# Altium PCB USB_Control.PcbDoc (part 1 of 2)
Units mil, origin at the board's own origin, x right, y up, seen from the top; angles counter-clockwise.
Board outline 3100 x 2250 mil, 4 copper layers (Component Side, Ground Plane, Power Plane, Solder Side), stack 26.634 mil thick; 203 components, 126 nets, 671 pads, 284 vias.
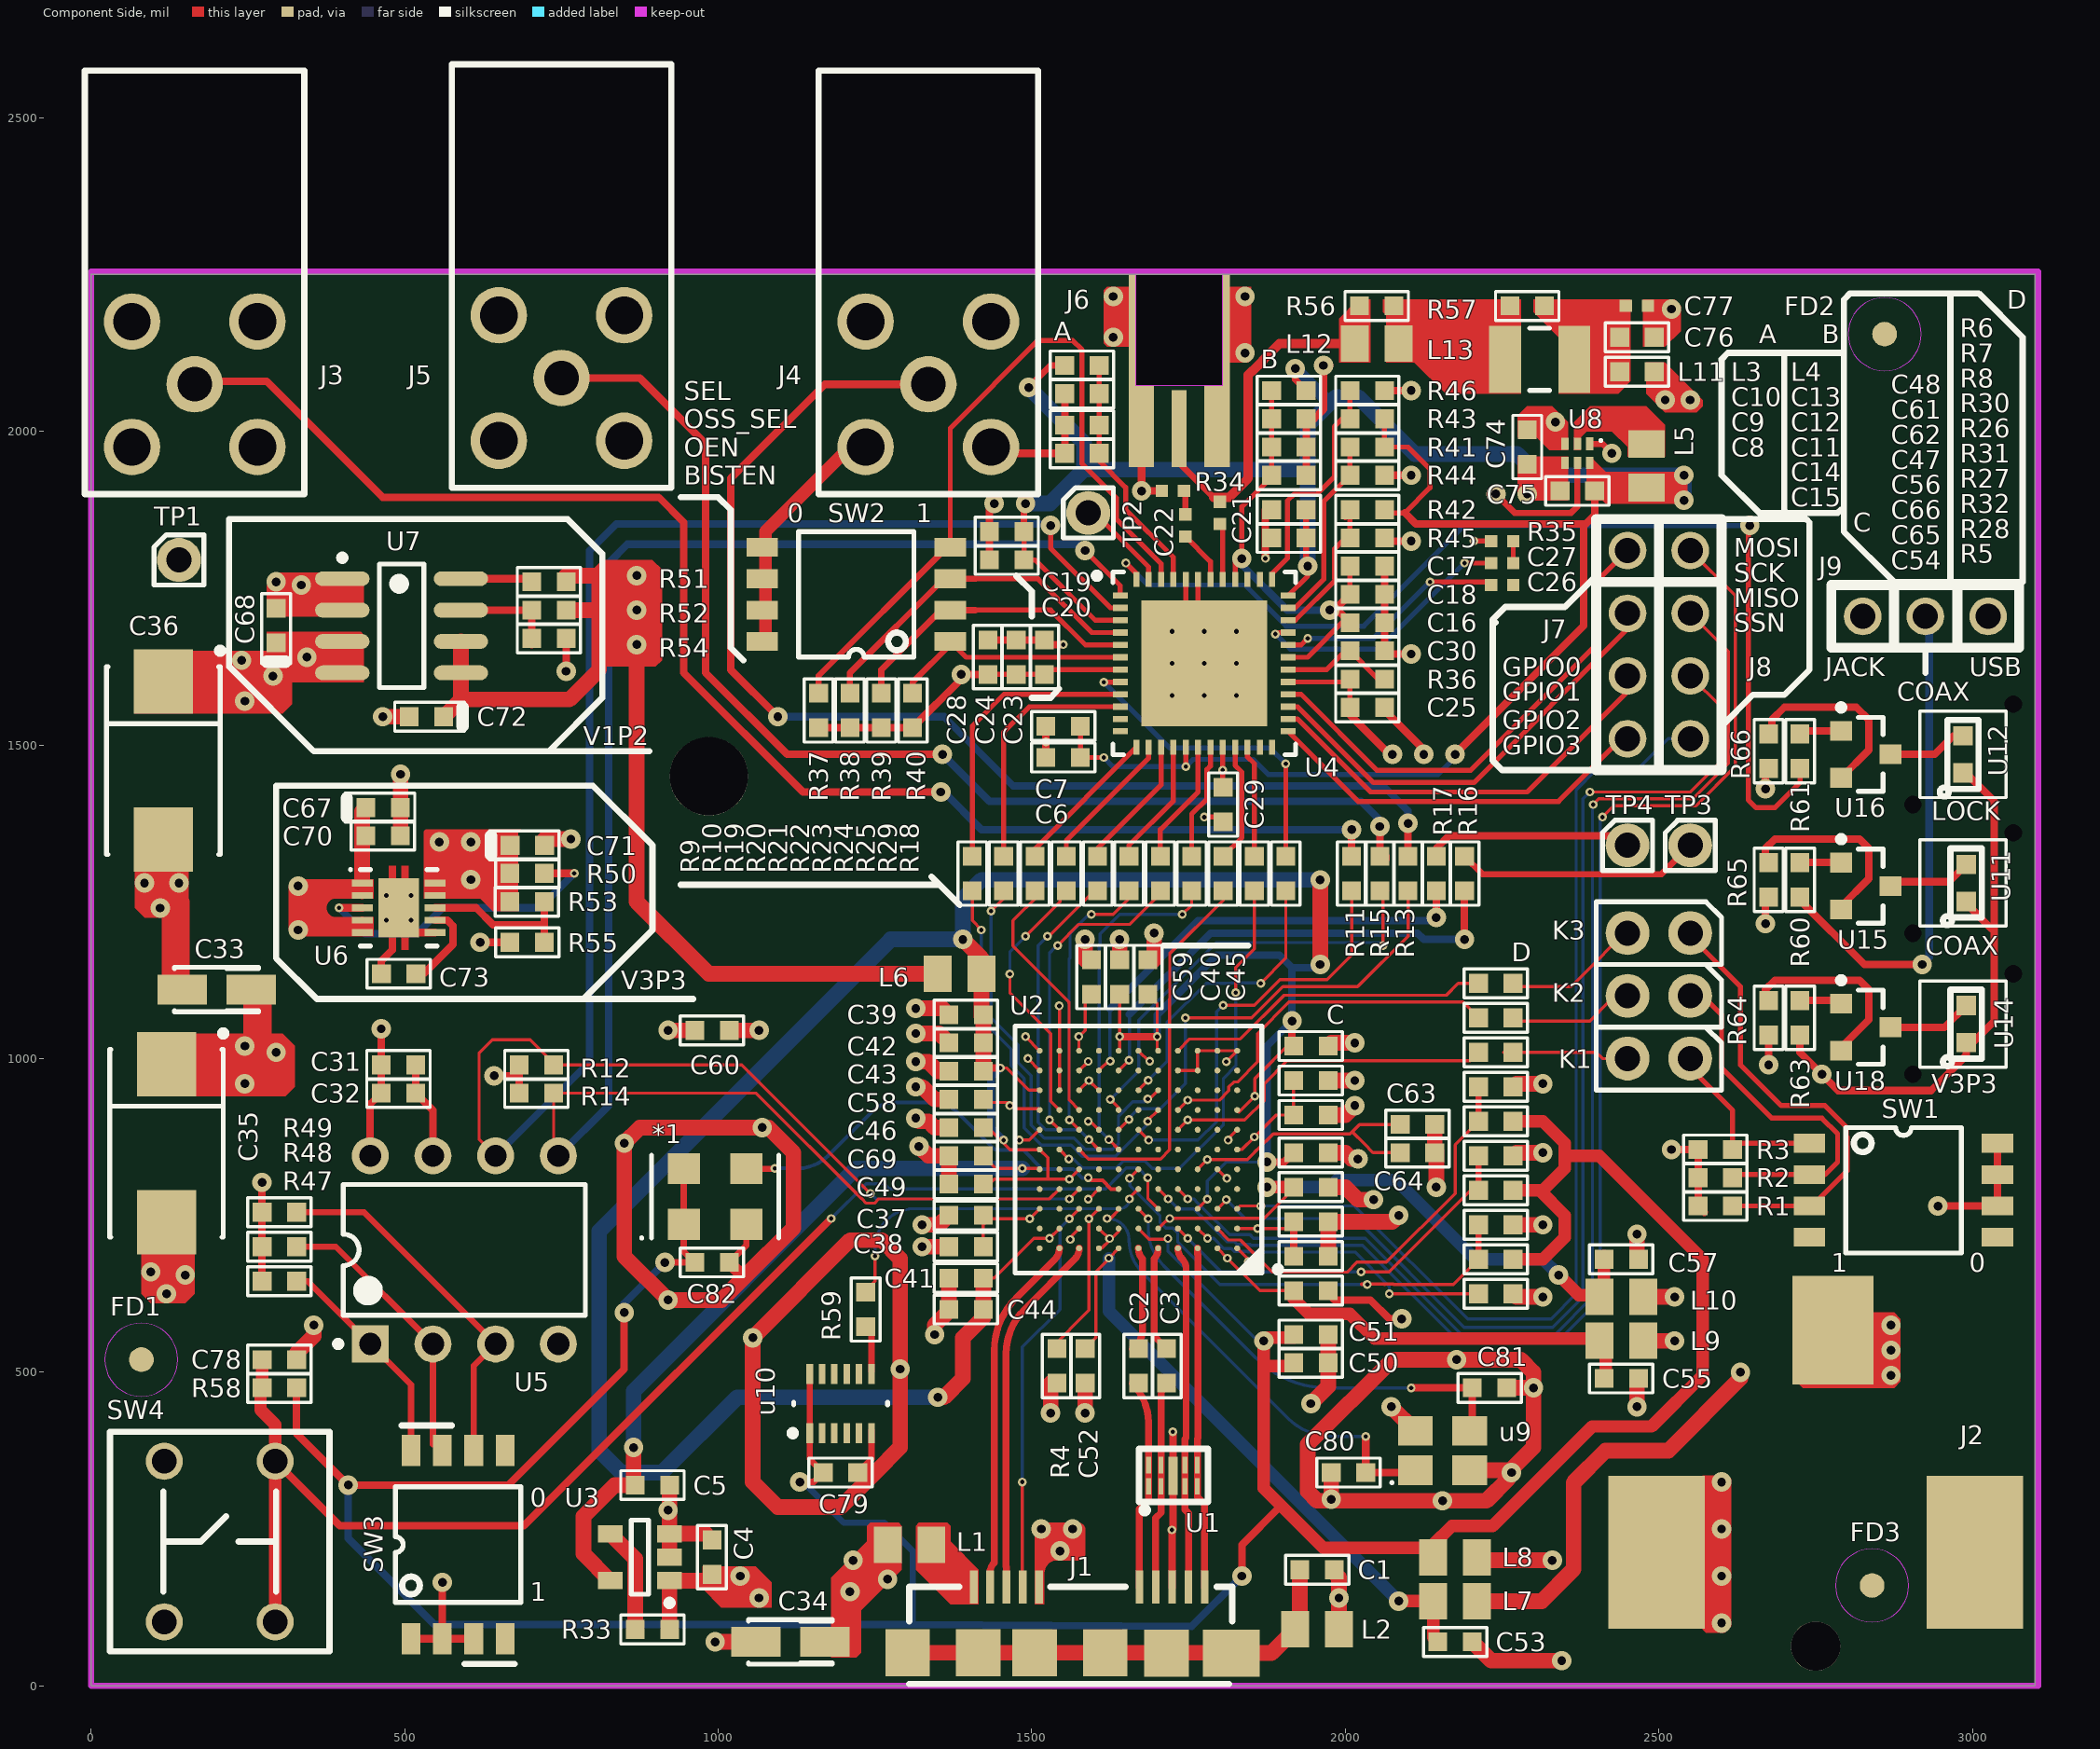
[diagram p0: Component Side view]
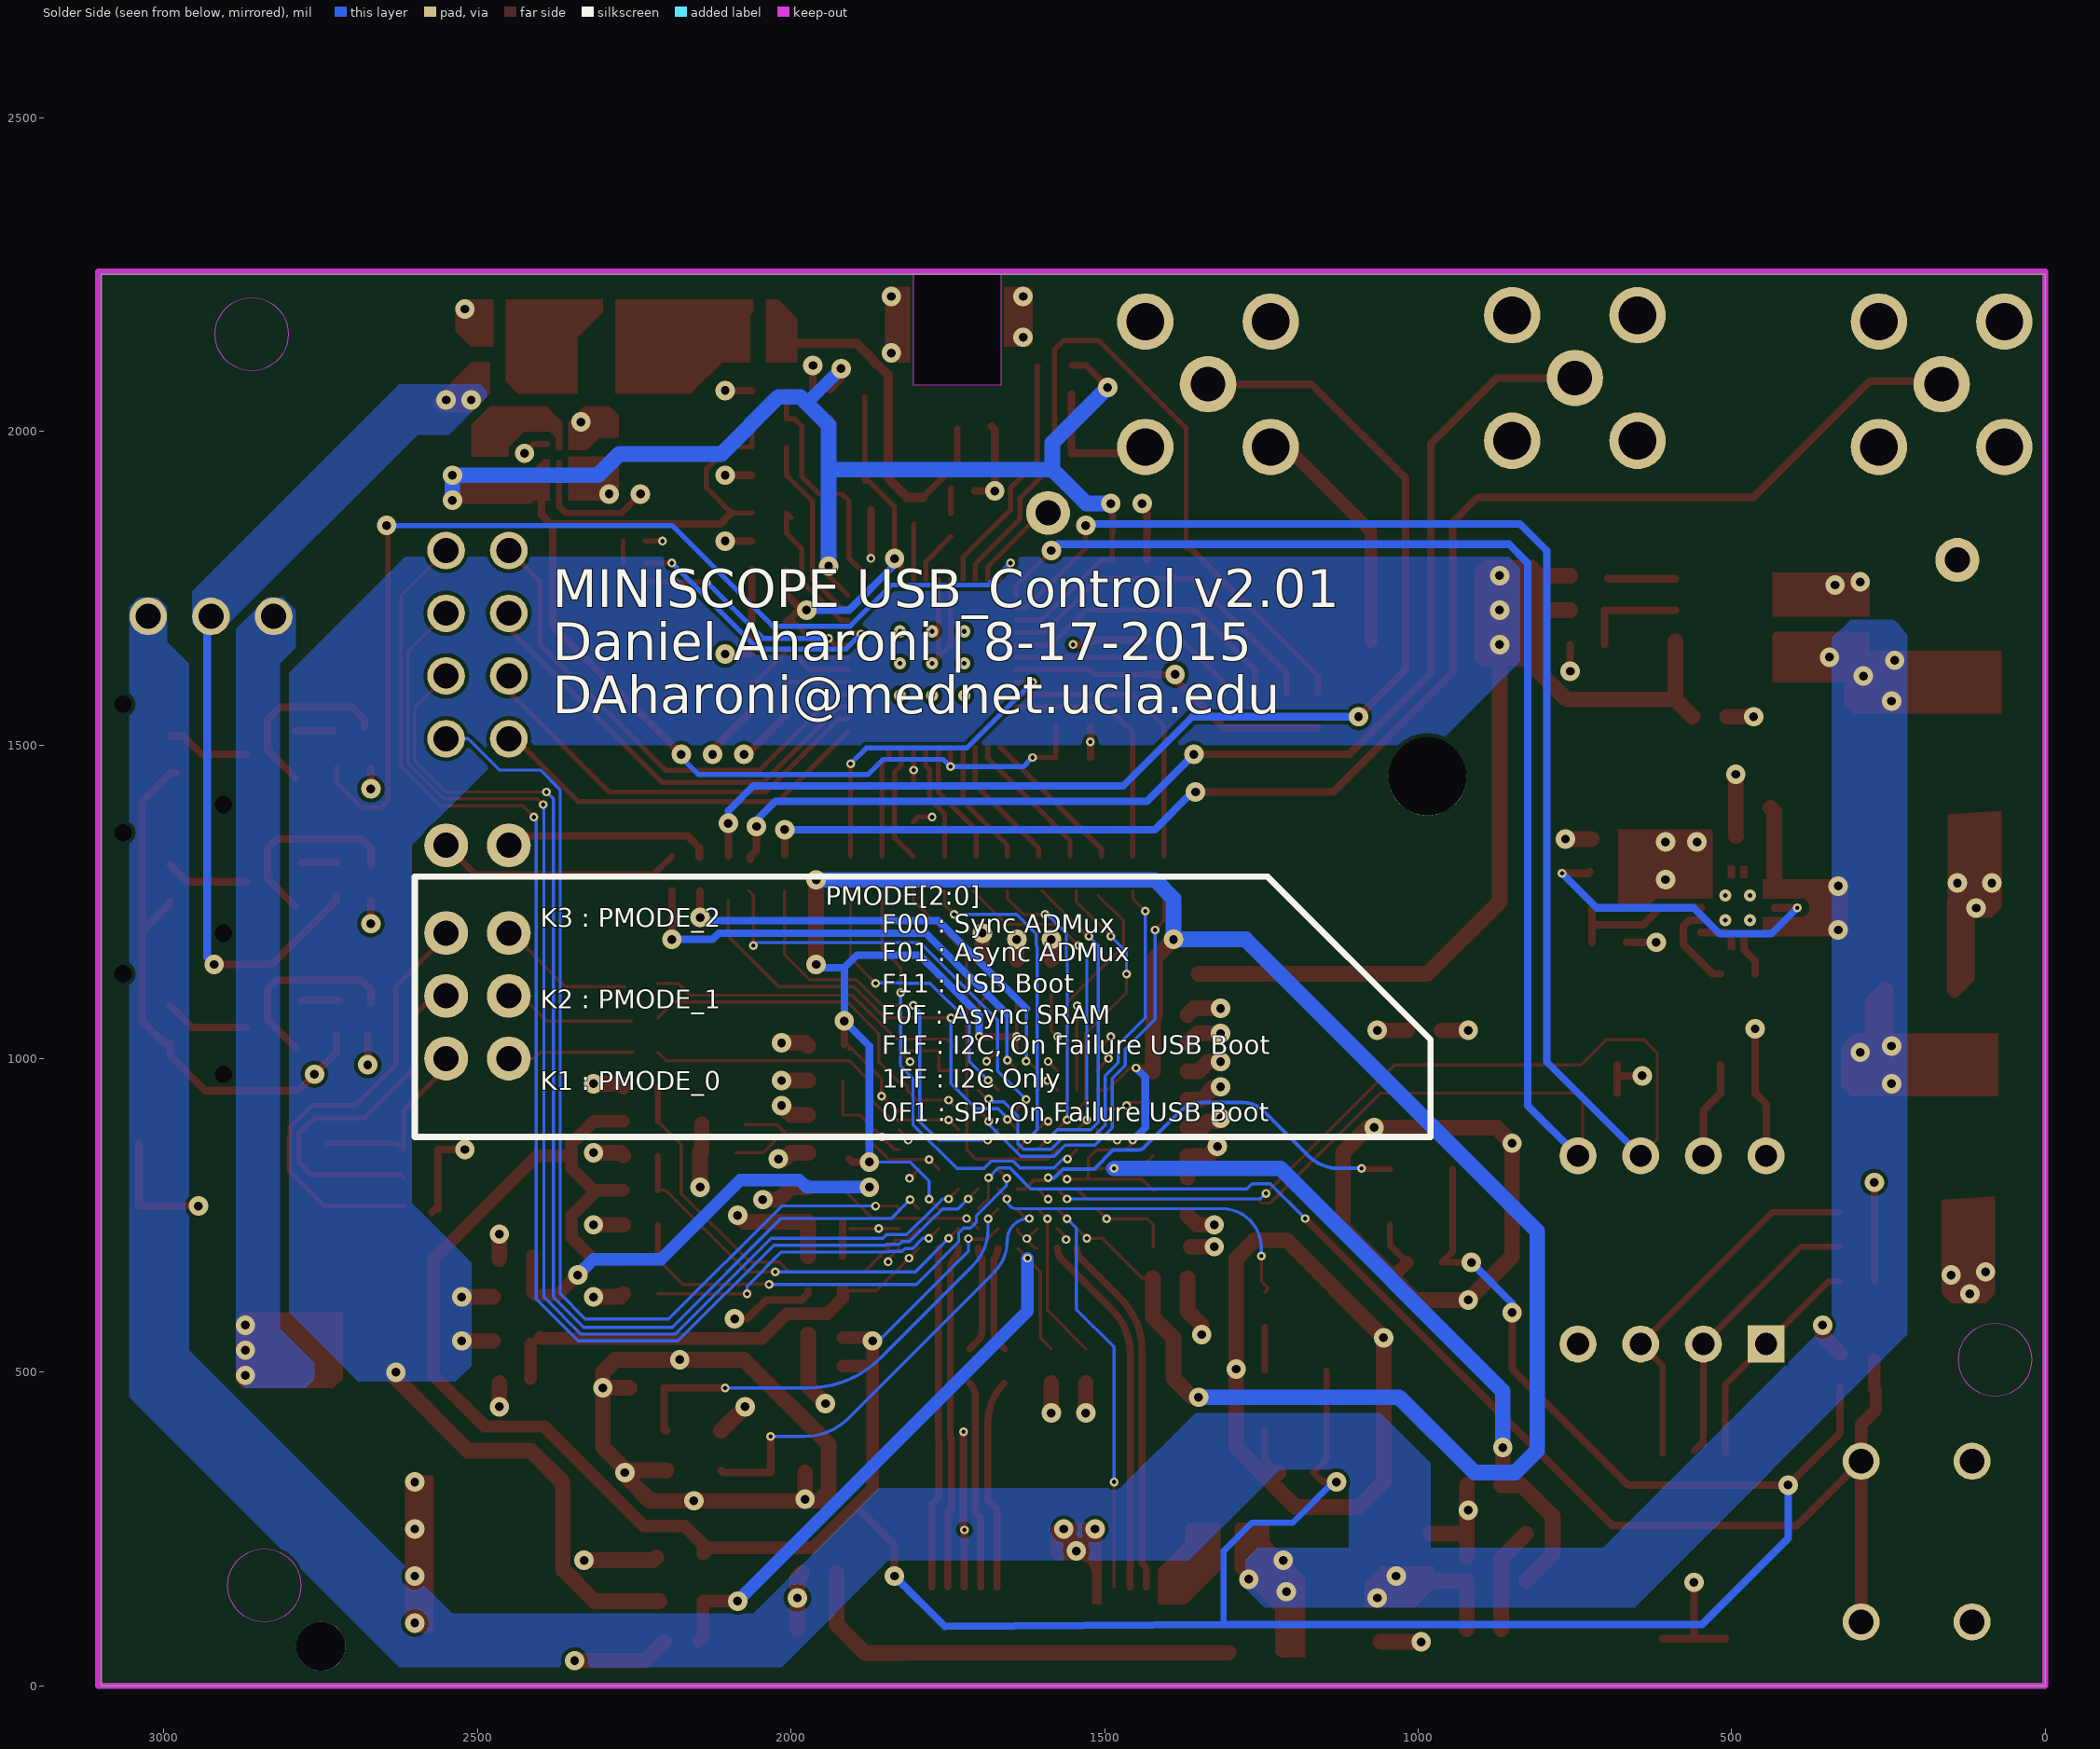
[diagram p1: Solder Side view, seen from below]
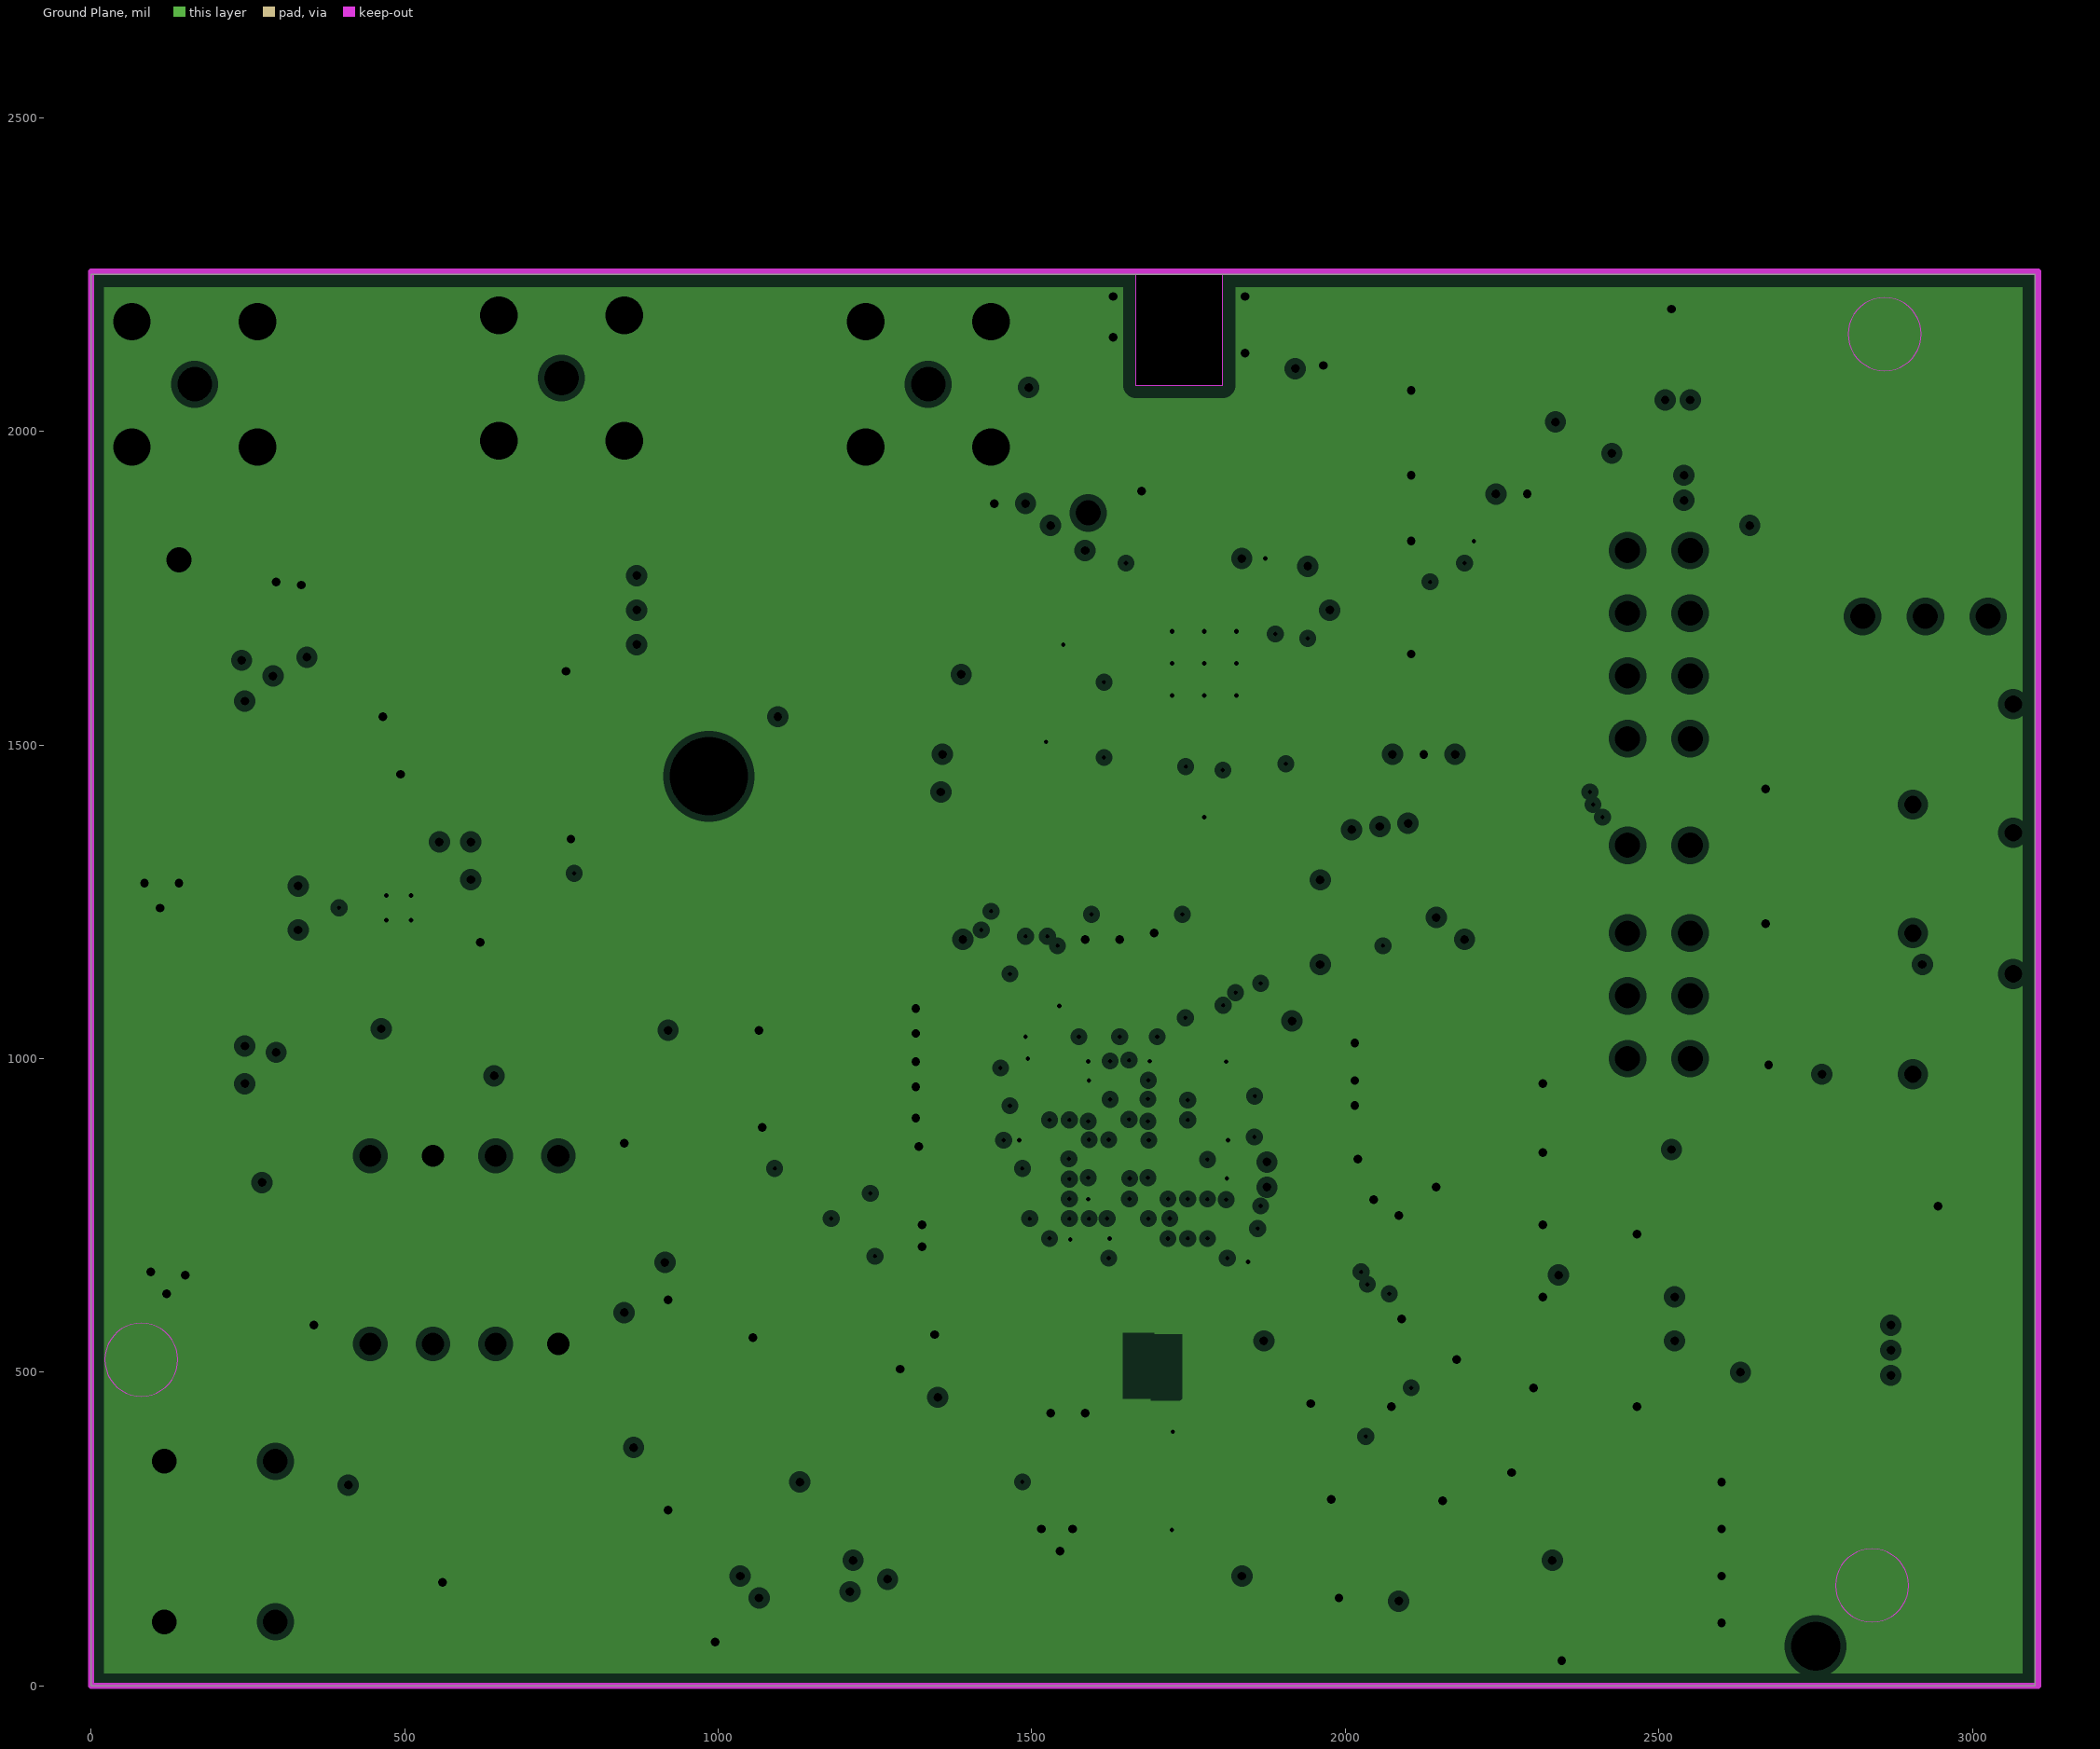
[diagram p2: Ground Plane, clearances drawn from the general rule]
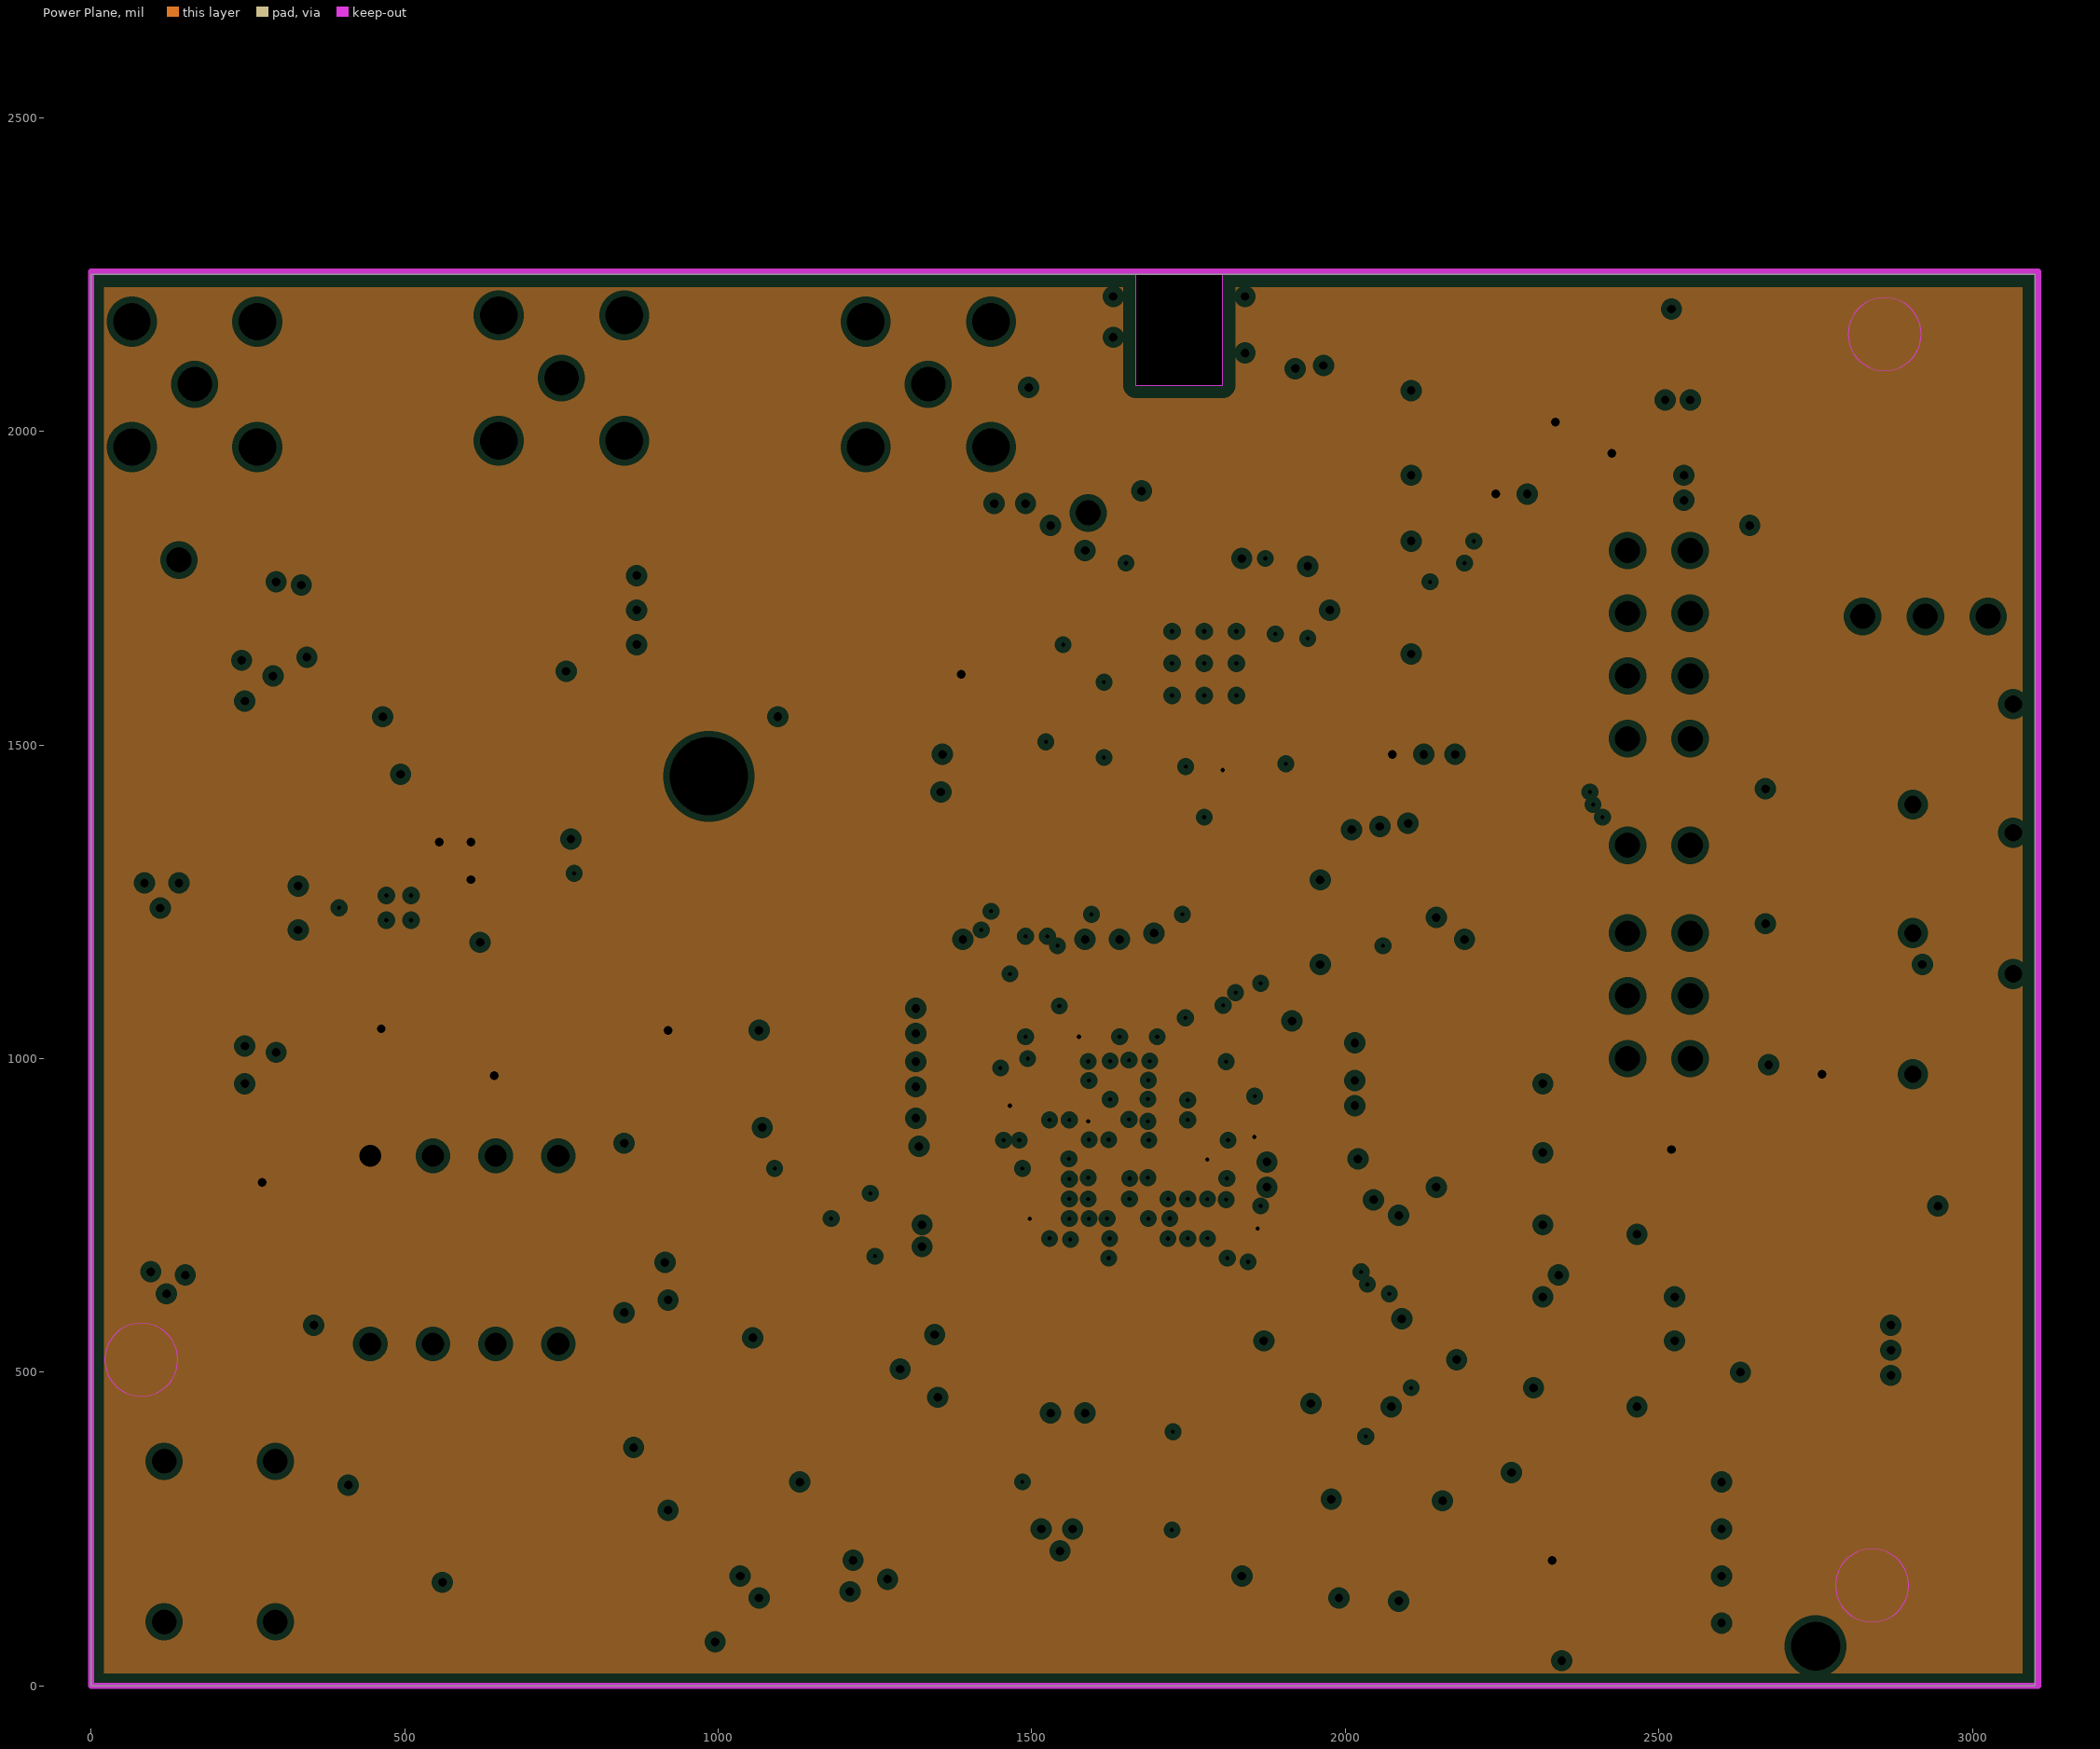
[diagram p3: Power Plane, clearances drawn from the general rule]

## Layer stack, top to bottom
Top Solder: solder mask 0.4, Solder Resist, Dk 3.5
Component Side: signal copper 1.4
Dielectric 1: core 8, FR-4, Dk 4.2
Ground Plane: plane copper 1.417, net GND
Dielectric 3: prepreg 5, Dk 4.2
Power Plane: plane copper 1.417, net VDDIO1
Dielectric 4: core 8, Dk 4.2
Solder Side: signal copper 1.4
Bottom Solder: solder mask 0.4, Solder Resist, Dk 3.5

## Board outline
0,0 3100,0 3100,2250 0,2250

## Design rules (kind name [scope] priority, off if disabled: settings)
Clearance [All] p1: gap=6
DiffPairsRouting [All] p1: maxlimit=10 minlimit=8 mostfreqgap=8 toplayer_minwidth=11 toplayer_maxwidth=11 toplayer_prefwidth=11 bottomlayer_minwidth=11 bottomlayer_maxwidth=11 bottomlayer_prefwidth=11 maxuncoupledlength=500
FanoutControl Fanout_BGA [IsBGA] p1: bgadir=Out bgaviamode=Centered fanoutstyle=BGA fanoutdirection=OutOnly viagrid=1 // Fanout_BGA (Default Rule)
MaxMinImpedance MaxMinImpedance_1 [InNet('D_N','D_P')] p1: minimum=90.00 maximum=110.0
MaxMinImpedance [InDifferentialPairClass('All Differential Pairs')] p2: minimum=84.00 maximum=96.00
MinimumSolderMaskSliver [All] p1: minsoldermaskwidth=5
PlaneClearance [All] p1: clearance=10
PlaneConnect [All] p1: planeconnectstyle=Direct reliefexpansion=20 reliefentries=4 reliefconductorwidth=10 reliefairgap=10
PolygonConnect [All] p1: connectstyle=Direct reliefconductorwidth=10 reliefentries=4 polygonreliefangle="90 Angle" airgapwidth=10
RoutingVias [All] p1: holewidth=7 width=14 viastyle="Through Hole" minholewidth=7 minwidth=14 maxholewidth=7 maxwidth=14
SilkToSilkClearance [All] p1: silktosilkclearance=5
SolderMaskExpansion [All] p1: expansion=1.5
UnpouredPolygon [All] p1: allowunpoured=FALSE
Width [All] p1: maxlimit=50 minlimit=5 preferedwidth=5 minimp=50.000000 maximp=50.000000 favimp=50.000000
23 further rules are at their usual default settings.

## Classes and differential pairs
component class deserial: C6 C7 C8 C9 C10 C11 C12 C13 C14 C15 C16 C17 C18 C19 C20 C21 C22 C23 C24 C25 C26 C27 C28 C29 C30 J7 L3 L4 R34 R35 R36 R37 R38 R39 R40 R41 R42 R43 R44 R45 R46 SW2 TP1 TP2 U4
component class connectors: C76 C77 J3 J4 J5 J6 J8 J9 L11 L12 L13 R56 R57
component class clocks: *1 C79 C80 C81 C82 R59 u9 u10
component class eeprom_memory: C31 C32 R47 R48 R49 SW3 U5
component class EZ_USB: C1 C2 C3 C4 C5 J1 K1 K2 K3 L1 L2 R1 R2 R3 R4 R5 R6 R7 R8 R9 R10 R11 R12 R13 R14 R15 R16 R17 R18 R19 R20 R21 R22 R23 R24 R25 R26 R27 R28 R29 R30 R31 R32 R33 SW1 TP3 TP4 U1 U2 U3
component class power: C33 C34 C35 C36 C37 C38 C39 C40 C41 C42 C43 C44 C45 C46 C47 C48 C49 C50 C51 C52 C53 C54 C55 C56 C57 C58 C59 C60 C61 C62 C63 C64 C65 C66 C67 C68 C69 C70 C71 C72 C73 C74 C75 J2 L5 L6 L7 L8 L9 L10 R50 R51 R52 R53 R54 R55 U6 U7 U8
component class reset: C78 R58 SW4
net class DQ[0..9]: DQ2 DQ3 DQ4 DQ5 DQ6 DQ7 DQ8 DQ9
component class LEDs: COAX FD1 FD2 FD3 LOCK R60 R61 R63 R64 R65 R66 U10 U11 U12 U14 U15 U16 U18 V3P3
differential pair SS_D: +SS_D_P -SS_D_N
differential pair SS_RX: +SS_RX_P -SS_RX_N
differential pair SS_TX: +SS_TX_P -SS_TX_N
differential pair EZ_SSTX: +EZ_SSTX_P -EZ_SSTX_N

## Components (designator, comment, footprint, x,y, rotation, side; value= is the part's Value field where it differs from the comment)
*1 "FXO_HC53" FXO_HC53 995,780 r90 top
C1 "Capacitor" "SMD Capacitor 0603" 1955,185 r180 top
C2 "Capacitor" "SMD Capacitor 0603" 1670,510 r90 top
C3 "Capacitor" "SMD Capacitor 0603" 1715,510 r90 top
C4 "Capacitor" "SMD Capacitor 0603" 990,205 r270 top
C5 "Capacitor" "SMD Capacitor 0603" 895,320 r180 top
C6 "0.01uF" "SMD Capacitor 0603" 1550,1480 r180 top
C7 ".1uF" "SMD Capacitor 0603" 1550,1530 r180 top
C8 "0.01uF" "SMD Capacitor 0603" 1580,1965 r180 top
C9 ".1uF" "SMD Capacitor 0603" 1580,2010 r180 top
C10 "4.7uF" "SMD Capacitor 0603" 1580,2060 r180 top
C11 "0.01uF" "SMD Capacitor 0603" 1910,1930 r0 top
C12 ".1uF" "SMD Capacitor 0603" 1910,1975 r0 top
C13 "22uF" "SMD Capacitor 0603" 1910,2020 r0 top
C14 "0.01uF" "SMD Capacitor 0603" 1910,1875 r180 top
C15 ".1uF" "SMD Capacitor 0603" 1910,1830 r180 top
C16 "0.01uF" "SMD Capacitor 0603" 2035,1695 r0 top
C17 ".1uF" "SMD Capacitor 0603" 2035,1785 r0 top
C18 "22uF" "SMD Capacitor 0603" 2035,1740 r0 top
C19 "0.01uF" "SMD Capacitor 0603" 1460,1840 r180 top
C20 ".1uF" "SMD Capacitor 0603" 1460,1795 r180 top
C21 "0.1uF" "SMD CAP 0402" 1800,1870 r90 top
C22 "0.047uF" "SMD CAP 0402" 1745,1850 r90 top
C23 "4.7uF" "SMD Capacitor 0603" 1520,1640 r90 top
C24 ".1uF" "SMD Capacitor 0603" 1475,1640 r90 top
C25 "0.01uF" "SMD Capacitor 0603" 2035,1560 r0 top
C26 "0.1uF" "SMD CAP 0402" 2250,1755 r0 top
C27 "0.047uF" "SMD CAP 0402" 2250,1790 r0 top
C28 "0.01uF" "SMD Capacitor 0603" 1430,1640 r90 top
C29 "0.01uF" "SMD Capacitor 0603" 1805,1405 r270 top
C30 "10uF" "SMD Capacitor 0603" 2035,1650 r0 top
C31 "Capacitor" "SMD Capacitor 0603" 490,990 r0 top
C32 "Capacitor" "SMD Capacitor 0603" 490,945 r0 top
C33 "T491A" A 200,1110 r180 top
C34 "T491A" A 1115,70 r180 top
C35 "T495D" D 120,865 r270 top
C36 "T495D" D 115,1475 r270 top
C37 "Capacitor" "SMD Capacitor 0603" 1395,750 r0 top
C38 "Capacitor" "SMD Capacitor 0603" 1395,700 r0 top
C39 "Capacitor" "SMD Capacitor 0603" 1395,1070 r0 top
C40 "Capacitor" "SMD Capacitor 0603" 1640,1130 r270 top
C41 "Capacitor" "SMD Capacitor 0603" 1395,650 r0 top
C42 "Capacitor" "SMD Capacitor 0603" 1395,1025 r0 top
C43 "Capacitor" "SMD Capacitor 0603" 1395,980 r0 top
C44 "Capacitor" "SMD Capacitor 0603" 1395,600 r0 top
C45 "Capacitor" "SMD Capacitor 0603" 1685,1130 r270 top
C46 "Capacitor" "SMD Capacitor 0603" 1395,890 r0 top
C47 "Capacitor" "SMD Capacitor 0603" 1945,850 r180 top
C48 "Capacitor" "SMD Capacitor 0603" 1945,1020 r180 top
C49 "Capacitor" "SMD Capacitor 0603" 1395,800 r0 top
C50 "Capacitor" "SMD Capacitor 0603" 1945,515 r180 top
C51 "Capacitor" "SMD Capacitor 0603" 1945,560 r180 top
C52 "Capacitor" "SMD Capacitor 0603" 1585,510 r90 top
C53 "Capacitor" "SMD Capacitor 0603" 2175,70 r180 top
C54 "Capacitor" "SMD Capacitor 0603" 1945,630 r180 top
C55 "Capacitor" "SMD Capacitor 0603" 2440,490 r180 top
C56 "Capacitor" "SMD Capacitor 0603" 1945,795 r180 top
C57 "Capacitor" "SMD Capacitor 0603" 2440,680 r180 top
C58 "Capacitor" "SMD Capacitor 0603" 1395,935 r0 top
C59 "Capacitor" "SMD Capacitor 0603" 1595,1130 r270 top
C60 "Capacitor" "SMD Capacitor 0603" 990,1045 r180 top
C61 "Capacitor" "SMD Capacitor 0603" 1945,965 r180 top
C62 "Capacitor" "SMD Capacitor 0603" 1945,910 r180 top
C63 "Capacitor" "SMD Capacitor 0603" 2115,895 r180 top
C64 "Capacitor" "SMD Capacitor 0603" 2115,850 r180 top
C65 "Capacitor" "SMD Capacitor 0603" 1945,685 r180 top
C66 "Capacitor" "SMD Capacitor 0603" 1945,740 r180 top
C67 "Capacitor Polarized" "Capacitor Polarized 0603" 415,1400 r0 top
C68 "Capacitor Polarized" "Capacitor Polarized 0603" 295,1640 r90 top
C69 "Capacitor" "SMD Capacitor 0603" 1395,845 r0 top
C70 "Capacitor" "SMD Capacitor 0603" 465.31,1355.31 r180 top
C71 "Capacitor Polarized" "Capacitor Polarized 0603" 645,1340 r0 top
C72 "Capacitor Polarized" "Capacitor Polarized 0603" 585,1545 r180 top
C73 "Capacitor" "SMD Capacitor 0603" 490.31,1135.31 r0 top
C74 "2.2uF" "SMD Capacitor 0603" 2290,1975 r270 top
C75 "4.7uF" "SMD Capacitor 0603" 2370,1905 r180 top
C76 "4.7uF" "SMD Capacitor 0603" 2465,2150 r0 top
C77 ".1uF" "SMD CAP 0402" 2465,2200 r0 top
C78 "Capacitor" "SMD Capacitor 0603" 300,520 r180 top
C79 "Capacitor" "SMD Capacitor 0603" 1195,340 r180 top
C80 "Capacitor" "SMD Capacitor 0603" 2005,340 r0 top
C81 "Capacitor" "SMD Capacitor 0603" 2230,475 r180 top
C82 "Capacitor" "SMD Capacitor 0603" 990,675 r180 top
COAX "Light Pipe" "Light Pipe" 2985,1280 r0 top (schematic designator V12P0)
FD1 "Fiducial Mark" "Fiducial Round" 80,520 r0 top
FD2 "Fiducial Mark" "Fiducial Round" 2860,2155 r0 top
FD3 "Fiducial Mark" "Fiducial Round" 2840,160 r0 top
J1 "USB3 MicroB" PCBComponent_1 1560,105 r0 top
J2 "DC-Power Jack" "PCBComponent_1 - duplicate" 2750,-55 r90 top
J3 "SMA" "SMA Right Angle Through Hole" 165,2075 r0 top
J4 "SMA" "SMA Right Angle Through Hole" 1335,2075 r0 top
J5 "SMA" "SMA Right Angle Through Hole" 750,2085 r0 top
J6 "Coax Connector" "SSMCX EDGE" 1735,2250 r0 top
J7 "4 Pin Connector" "4Pin Verital 0.1\"" 2450,1660 r270 top
J8 "4 Pin Connector" "4Pin Verital 0.1\"" 2550,1660 r270 top
J9 "3 Pin Connector" "3Pin Verital 0.1\" JUMOER" 2925,1705 r0 top
K1 "JMPR2" JMPR2 2550,1000 r270 top
K2 "JMPR2" JMPR2 2550,1100 r270 top
K3 "JMPR2" JMPR2 2550,1200 r270 top
L1 "Ferrite Bead" BLM21PG221SN1D_0805 1305,225 r180 top
L2 "Ferrite Bead" BLM21PG221SN1D_0805 1955,90 r180 top
L3 "Ferrite Bead" BLM18KG601SN1D 1580,2105 r0 top
L4 "Ferrite Bead" BLM18KG601SN1D 1910,2065 r180 top
L5 "Ferrite Bead" LQM21PN2R2MC0D 2480,1945 r270 top
L6 "Ferrite Bead" MPZ2012S601A 1385,1135 r0 top
L7 "Ferrite Bead" MPZ2012S601A 2175,135 r180 top
L8 "Ferrite Bead" MPZ2012S601A 2175,205 r0 top
L9 "Ferrite Bead" MPZ2012S601A 2440,550 r180 top
L10 "Ferrite Bead" MPZ2012S601A 2440,620 r180 top
L11 "Ferrite Bead" BLM18KG601SN1D 2465,2095 r0 top
L12 "Ferrite Bead" CIG21L4R7MNE 2050,2140 r0 top
L13 "Ferrite Bead" CBC3225T101MR 2310,2115 r0 top
LOCK "Light Pipe" "Light Pipe" 2985,1485 r0 top
R1 "10K" "SMD Resistor 0603" 2590,765 r0 top
R2 "Resistor" "SMD Resistor 0603" 2590,810 r0 top
R3 "Resistor" "SMD Resistor 0603" 2590,855 r0 top
R4 "Resistor" "SMD Resistor 0603" 1540,510 r90 top
R5 "Resistor" "SMD Resistor 0603" 2240,625 r180 top
R6 "\"=Value\"" "SMD Resistor 0603" 2240,1120 r0 top
R7 "Resistor" "SMD Resistor 0603" 2240,1065 r0 top
R8 "Resistor" "SMD Resistor 0603" 2240,1010 r0 top
R9 "Resistor" "SMD Resistor 0603" 1405,1295 r90 top
R10 "Resistor" "SMD Resistor 0603" 1455,1295 r90 top
R11 "Resistor" "SMD Resistor 0603" 2010,1295 r90 top
R12 "Resistor" "SMD Resistor 0603" 710,990 r180 top
R13 "Resistor" "SMD Resistor 0603" 2100,1295 r90 top
R14 "Resistor" "SMD Resistor 0603" 710,945 r180 top
R15 "Resistor" "SMD Resistor 0603" 2055,1295 r90 top
R16 "Resistor" "SMD Resistor 0603" 2190,1295 r90 top
R17 "Resistor" "SMD Resistor 0603" 2145,1295 r90 top
R18 "Resistor" "SMD Resistor 0603" 1905,1295 r90 top
R19 "Resistor" "SMD Resistor 0603" 1505,1295 r90 top
R20 "Resistor" "SMD Resistor 0603" 1555,1295 r90 top
R21 "Resistor" "SMD Resistor 0603" 1605,1295 r90 top
R22 "Resistor" "SMD Resistor 0603" 1655,1295 r90 top
R23 "Resistor" "SMD Resistor 0603" 1705,1295 r90 top
R24 "Resistor" "SMD Resistor 0603" 1755,1295 r90 top
R25 "Resistor" "SMD Resistor 0603" 1805,1295 r90 top
R26 "Resistor" "SMD Resistor 0603" 2240,900 r0 top
R27 "Resistor" "SMD Resistor 0603" 2240,790 r0 top
R28 "Resistor" "SMD Resistor 0603" 2240,680 r0 top
R29 "Resistor" "SMD Resistor 0603" 1855,1295 r90 top
R30 "Resistor" "SMD Resistor 0603" 2240,955 r180 top
R31 "Resistor" "SMD Resistor 0603" 2240,845 r180 top
R32 "Resistor" "SMD Resistor 0603" 2240,735 r180 top
R33 "Resistor" "SMD Resistor 0603" 895,90 r0 top
R34 "49.9" "SMD RES 0402" 1725,1905 r180 top
R35 "49.9" "SMD RES 0402" 2250,1825 r180 top
R36 "10k" "SMD Resistor 0603" 2035,1605 r0 top
R37 "10k" "SMD Resistor 0603" 1160,1555 r270 top
R38 "10k" "SMD Resistor 0603" 1210,1555 r270 top
R39 "10k" "SMD Resistor 0603" 1260,1555 r270 top
R40 "10k" "SMD Resistor 0603" 1310,1555 r270 top
R41 "10k" "SMD Resistor 0603" 2035,1975 r0 top
R42 "10k" "SMD Resistor 0603" 2035,1875 r0 top
R43 "10k" "SMD Resistor 0603" 2035,2020 r0 top
R44 "?" "SMD Resistor 0603" 2035,1930 r180 top
R45 "?" "SMD Resistor 0603" 2035,1830 r180 top
R46 "?" "SMD Resistor 0603" 2035,2065 r180 top
R47 "Resistor" "SMD Resistor 0603" 300,645 r180 top
R48 "Resistor" "SMD Resistor 0603" 300,700 r180 top
R49 "Resistor" "SMD Resistor 0603" 300,755 r180 top
R50 "Resistor" "SMD Resistor 0603" 695.31,1295.31 r180 top
R51 "Resistor" "SMD Resistor 0603" 730,1760 r0 top
R52 "Resistor" "SMD Resistor 0603" 730,1715 r0 top
R53 "Resistor" "SMD Resistor 0603" 695,1250 r180 top
R54 "Resistor" "SMD Resistor 0603" 730,1670 r180 top
R55 "Resistor" "SMD Resistor 0603" 695.31,1185.31 r0 top
R56 "1k" "SMD Resistor 0603" 2050,2200 r0 top
R57 "1k" "SMD Resistor 0603" 2290,2200 r0 top
R58 "Resistor" "SMD Resistor 0603" 300,475 r0 top
R59 "Resistor" "SMD Resistor 0603" 1235,600 r90 top
R60 "Resistor" "SMD Resistor 0603" 2725,1285 r270 top
R61 "Resistor" "SMD Resistor 0603" 2725,1490 r270 top
R63 "Resistor" "SMD Resistor 0603" 2725,1065 r270 top
R64 "Resistor" "SMD Resistor 0603" 2675,1065 r90 top
R65 "Resistor" "SMD Resistor 0603" 2675,1285 r90 top
R66 "Resistor" "SMD Resistor 0603" 2675,1490 r90 top
SW1 "SW_DIP_4Position" 218-4LPST 2740,865 r0 top
SW2 "SW_DIP_4Position" 218-4LPST 1370,1665 r180 top
SW3 "SW_DIP_4Position" 218-4LPST 510,75 r90 top
SW4 "PB_Switch" EVQPAC07K 205,230 r0 top
TP1 "TESTPIN" TESTPIN 140,1795 r0 top
TP2 "TESTPIN" TESTPIN 1590,1870 r0 top
TP3 "TESTPIN" TESTPIN 2550,1340 r0 top
TP4 "TESTPIN" TESTPIN 2450,1340 r0 top
U1 "ESD_4Channel" SP3010-04UTG 1725,335 r180 top
U2 "EZ FX3 USB" BGA121C80P11X11_1000X1000X100 1670,855 r180 top
U3 "USB Overvoltage Protection" "TSOP-5 _ NCP361SNT1G" 875,205 r180 top
U4 "DS90UR914A" "WQFN48 for DS90UB914A" 1775,1630 r0 top
U5 "24AA1025-I/P" PDIP300-P8 595,695 r90 top
U6 "TPS74801DRCR" TI-DRC10-2400X1650TP_V 490.31,1240.31 r0 top
U7 "TPS76801QD" TI-D8_N 495,1690 r0 top
U8 "TPS62231DRYT" DRY6 2370,1964.84 r270 top
u9 "CrystalOSC_General" NX3225SA 2155,375 r90 top
u10 "SG-3040LC" SG-3040LC 1195,450 r90 top
U11 "LED" LED_0603 2990,1280 r90 top
U12 "LED" LED_0603 2985,1485 r90 top
U14 "LED" LED_0603 2990,1055 r90 top
U15 "transistor NPN" SOT23127P600-8N 2830,1275 r0 top
U16 "transistor NPN" SOT23127P600-8N 2830,1485 r0 top
U18 "transistor NPN" SOT23127P600-8N 2830,1050 r0 top
V3P3 "Light Pipe" "Light Pipe" 2985,1055 r0 top

## Footprints (in the part's own frame and the unit in brackets; to place one, negate y for a bottom-side part, rotate by r counter-clockwise, add the part's x,y. Pads: shape width x height; smd on the part's side, far side on the other; paste and mask are expansions set on the pad)
"3Pin Verital 0.1\" JUMOER" [mil] "3Pin Verital 0.1\""
  round 60 hole 40: 1(-100,0) 2(0,0) 3(100,0)
  silkscreen extent -150,-50 150,50, body extent -140,-50 142,50, height 335
"4Pin Verital 0.1\"" [mil] "4Pin Verital 0.1\""
  round 60 hole 40: 1(-150,0) 2(-50,0) 3(50,0) 4(150,0)
  silkscreen extent -200,-50 200,50, body extent -190,-50 190,50, height 335
218-4LPST [mm] "4 position switch"
  rect 1.27x0.76 smd: 1(0,0) 2(0,-1.27) 3(0,-2.54) 4(0,-3.81) 5(7.62,-3.81) 6(7.62,-2.54) 7(7.62,-1.27) 8(7.62,0)
  silkscreen extent 1.47,-4.44 6.15,0.64
A [mm] "Capacitor, SM Tantalum; Body 3.2 x 1.6 mm (LxW typ)"
  rect 2x1.2 smd: 1(-1.4,0) 2(1.4,0)
  silkscreen extent -1.7,-0.9 1.7,0.9
BGA121C80P11X11_1000X1000X100 [mm] "BGA, 121-Leads, Body 10.00x10.00mmx1.00mm, Pitch 0.80mm"
  round 0.24 smd: A1(-4,4) A2(-3.2,4) A3(-2.4,4) A4(-1.6,4) A5(-0.8,4) A6(0,4) A7(0.8,4) A8(1.6,4) A9(2.4,4) A10(3.2,4) A11(4,4) B1(-4,3.2) B2(-3.2,3.2) B3(-2.4,3.2) B4(-1.6,3.2) B5(-0.8,3.2) B6(0,3.2) B7(0.8,3.2) B8(1.6,3.2) B9(2.4,3.2) B10(3.2,3.2) B11(4,3.2) C1(-4,2.4) C2(-3.2,2.4) C3(-2.4,2.4) C4(-1.6,2.4) C5(-0.8,2.4) C6(0,2.4) C7(0.8,2.4) C8(1.6,2.4) C9(2.4,2.4) C10(3.2,2.4) C11(4,2.4) D1(-4,1.6) D2(-3.2,1.6) D3(-2.4,1.6) D4(-1.6,1.6) D5(-0.8,1.6) D6(0,1.6) D7(0.8,1.6) D8(1.6,1.6) D9(2.4,1.6) D10(3.2,1.6) D11(4,1.6) E1(-4,0.8) E2(-3.2,0.8) E3(-2.4,0.8) E4(-1.6,0.8) E5(-0.8,0.8) E6(0,0.8) E7(0.8,0.8) E8(1.6,0.8) E9(2.4,0.8) E10(3.2,0.8) E11(4,0.8) F1(-4,0) F2(-3.2,0) F3(-2.4,0) F4(-1.6,0) F5(-0.8,0) F6(0,0) F7(0.8,0) F8(1.6,0) F9(2.4,0) F10(3.2,0) F11(4,0) G1(-4,-0.8) G2(-3.2,-0.8) G3(-2.4,-0.8) G4(-1.6,-0.8) G5(-0.8,-0.8) G6(0,-0.8) G7(0.8,-0.8) G8(1.6,-0.8) G9(2.4,-0.8) G10(3.2,-0.8) G11(4,-0.8) H1(-4,-1.6) H2(-3.2,-1.6) H3(-2.4,-1.6) H4(-1.6,-1.6) H5(-0.8,-1.6) H6(0,-1.6) H7(0.8,-1.6) H8(1.6,-1.6) H9(2.4,-1.6) H10(3.2,-1.6) H11(4,-1.6) J1(-4,-2.4) J2(-3.2,-2.4) J3(-2.4,-2.4) J4(-1.6,-2.4) J5(-0.8,-2.4) J6(0,-2.4) J7(0.8,-2.4) J8(1.6,-2.4) J9(2.4,-2.4) J10(3.2,-2.4) J11(4,-2.4) K1(-4,-3.2) K2(-3.2,-3.2) K3(-2.4,-3.2) K4(-1.6,-3.2) K5(-0.8,-3.2) K6(0,-3.2) K7(0.8,-3.2) K8(1.6,-3.2) K9(2.4,-3.2) K10(3.2,-3.2) K11(4,-3.2) L1(-4,-4) L2(-3.2,-4) L3(-2.4,-4) L4(-1.6,-4) L5(-0.8,-4) L6(0,-4) L7(0.8,-4) L8(1.6,-4) L9(2.4,-4) L10(3.2,-4) L11(4,-4)
  silkscreen extent -5.77,-5 5,5, body extent -5,-5 5,5, height 1
BLM18KG601SN1D [mil] "0603 Ferrite Chip 600OHM 1.3A"
  rect 30x30 smd: 1(-27.5,0) 2(27.5,0)
  silkscreen extent -50,-23 50,23, body extent -32,-15 32,15, height 19
BLM21PG221SN1D_0805 [mm] "Chip Inductor, 2-Leads, 0805, BLM21PG221SN1D"
  rect 1.13x1.47 smd: 1(-0.885,0) 2(0.885,0)
  body extent -1.1,-0.72 1.1,0.72, height 1.05
"Capacitor Polarized 0603" [mil]
  rect 30x30 smd: +(23,0) -(78,0)
  silkscreen extent -10,-23 101,23, body extent 19,-15 82,15, height 19
CBC3225T101MR [mm] "Chip Inductor, 2-Leads, Body 3.20x2.50mm, IPC Medium Density, 100uH, 340mA, 1.82OHM"
  rect 1.29x2.72 smd: 1(-1.405,0) 2(1.405,0)
  silkscreen extent -0.4,-1.26 0.4,1.26, body extent -1.7,-1.35 1.7,1.35, height 2.7
CIG21L4R7MNE [mm] "SMD 0805 4.7uH, 750mA"
  rect 1.13x1.47 smd: 1(-0.885,0) 2(0.885,0)
  body extent -1.1,-0.72 1.1,0.72, height 1.05
D [mm] "Capacitor, SM Tantalum; Body 7.3 x 4.3 mm (LxW typ)"
  rect 2.6x2.4 smd: 1(-3.2,0) 2(3.2,0)
  silkscreen extent -4.57,-2.3 3.8,2.43
DRY6 [mm] "PSON, 6-Leads, Body 1x1.45mm, Pitch 0.5mm, TI Recommended"
  rect 0.52x0.3 smd paste+0 mask+0.05: 1(-0.385,0.5)
  rect 0.49x0.3 smd paste+0 mask+0.05: 2(-0.385,0) 3(-0.385,-0.5) 4(0.385,-0.5) 5(0.385,0) 6(0.385,0.5)
  silkscreen extent -0.57,0.9 -0.48,1, body extent -0.53,-0.75 0.53,0.75, height 0.6
EVQPAC07K [mm] "Push Button Switch"
  round 1.5 hole 1: 1(-2.25,-3.25) 1(-2.25,3.25) 2(2.25,-3.25) 2(2.25,3.25)
  silkscreen extent -4.44,-4.44 4.44,4.44
"Fiducial Round" [mm] "Fiducial Round 1mm"
  round 1 smd paste-1 mask+1: NC(0,0)
  Keep-Out Layer circle w0: c0,0 r1.481
FXO_HC53 [mm] "Oscillator_CMOS_3.3V"
  rect 1.25x1.3 smd: 1(-1.125,1.27) 2(-1.125,-1.27) 3(1.125,-1.27) 4(1.125,1.27)
  silkscreen extent -1.72,-2.58 1.68,3.02, body extent -1.68,-2.58 1.68,2.57, height 1.4
JMPR2 [mil]
  round 70 hole 40: 1(0,0) 2(0,-100)
  silkscreen extent -50,-150 50,50, body extent -50,-150 50,50, height 300
LED_0603 [mil] "LTST-C190KGKT"
  rect 31x31 smd: A(-29.5,0) C(29.5,0)
  silkscreen extent -67,-25 55,37
"Light Pipe" [mil] "Light Pipe"
  round 0 hole 28 unplated: NC(-80,-80) NC(80,80)
  silkscreen extent -69,-69 69,69
LQM21PN2R2MC0D [mm] "SMD Fixed Ind. 2.2uH, 600mA, 0805"
  rect 1.13x1.47 smd: 1(-0.885,0) 2(0.885,0)
  body extent -1.1,-0.72 1.1,0.72, height 1.05
MPZ2012S601A [mm] "Ferrite Chip 600Ohm"
  rect 1.13x1.47 smd: 1(-0.885,0) 2(0.885,0)
  body extent -1.1,-0.72 1.1,0.72, height 1.05
NX3225SA [mm] "Crystal"
  rect 1.2x1.4 smd: 1(-0.8,1.1) 2(0.8,-1.1) NC(-0.8,-1.1) NC(0.8,1.1)
  silkscreen extent -1.35,2 -1.25,2.1, body extent -1.3,-1.65 1.3,1.65, height 0.6
PCBComponent_1 [mil] "897-10-010-40-300002 SERIES 897 • UNIVERSAL SERIAL BUS 3.0 MICRO-B"
  rect 12x53 smd: 1(-152.5,52.75) 2(-126.5,52.75) 3(-100.5,52.75) 4(-74.5,52.75) 5(-48.5,52.75) 6(111.5,52.75) 7(137.5,52.75) 8(163.5,52.75) 9(189.5,52.75) 10(215.5,52.75)
  rect 71x75 smd: 11(-258,-52.25) 11(-145.5,-52.25) 11(-55.5,-52.25) 11(57,-52.25) 11(155,-52.75)
  rect 91x75 smd: 11(258,-52.75)
  silkscreen extent -256,-102 260,53
"PCBComponent_1 - duplicate" [mm]
  rect 4.4x3.3 smd: 1(15.8,-0.7)
  rect 6.2x3.9 smd: 2(6.8,6.45) 3(6.8,-6.45)
  round 2 hole 2 unplated paste+0 mask+0.102: HOLE(3,0)
  body extent 0,-7.73 17.1,7.47, height 11
PDIP300-P8 [mm] "DIP, 8-Leads, Row Spacing 7.62mm, Pitch 2.54mm, Body 9.5x6.6mm"
  rect 1.5x1.5 hole 0.9: 1(-3.81,3.81)
  round 1.5 hole 0.9: 2(-3.81,1.27) 3(-3.81,-1.27) 4(-3.81,-3.81) 5(3.81,-3.81) 6(3.81,-1.27) 7(3.81,1.27) 8(3.81,3.81)
  silkscreen extent -3.93,-4.9 2.65,5.23, body extent -3.55,-4.9 3.55,4.9, height 5.34
SG-3040LC [mm] "Oscillator_CMOS"
  rect 0.8x0.27 smd: 1(-1.2,1.25) 2(-1.2,0.75) 3(-1.2,0.25) 4(-1.2,-0.25) 5(-1.2,-0.75) 6(-1.2,-1.25) 7(1.2,-1.25) 8(1.2,-0.75) 9(1.2,-0.25) 10(1.2,0.25) 11(1.2,0.75) 12(1.2,1.25)
  silkscreen extent -1.32,-1.9 0.05,2.06, body extent -1.2,-1.9 1.2,1.9, height 1.2
"SMA Right Angle Through Hole" [mil] "CONREVSMA002"
  round 90 hole 55: 1(0,0)
  round 90 hole 60: 2(-100,-100) 2(-100,100) 2(100,-100) 2(100,100)
  silkscreen extent -175,-175 175,500
"SMD CAP 0402" [mm] "Chip Capacitor, 2-Leads, Body 1.00x0.50mm, IPC Medium Density"
  rect 0.5x0.5 smd: 0(-0.45,0) 1(0.45,0)
  body extent -0.53,-0.28 0.53,0.28, height 0.5
"SMD Capacitor 0603" [mil]
  rect 30x30 smd: 0(-27.5,0) 1(27.5,0)
  silkscreen extent -50,-23 51,23, body extent -32,-15 32,15, height 19
"SMD RES 0402" [mm]
  rect 0.5x0.5 smd: 0(-0.45,0) 1(0.45,0)
  body extent -0.53,-0.28 0.53,0.28, height 0.5
"SMD Resistor 0603" [mil]
  rect 30x30 smd: 0(-27.5,0) 1(27.5,0)
  silkscreen extent -50,-23 50,23, body extent -32,-15 32,15, height 20
SOT23127P600-8N [mm] "MMBT3904TPMSTR-ND"
  rect 0.9x0.8 smd: B(-1,0.95) C(1,0) E(-1,-0.95)
  silkscreen extent -1.12,-1.5 0.7,2.02, body extent -0.7,-1.52 0.7,1.52, height 1.12
SP3010-04UTG [mil] "ESD 4 Channel"
  rect 7.87x26.57 smd: 1(39,17) 2(19,17) 4(-19,17) 5(-39,17) 6(-39,-17) 7(-19,-17) 9(19,-17) 10(39,-17)
  rect 14.96x61 smd: GND(0,0)
  silkscreen extent -56,-43 54,60
"SSMCX EDGE" [mm] "SSMCX EDGE 0734154670"
  rect 0.6x3.11 smd mask+0: 0(0,-6.245)
  rect 0.285x7.8 smd mask+0: 1(-1.907,-3.9) 1(1.907,-3.9)
  rect 0.75x3.31 smd mask+0: 1(-1.39,-6.145) 1(1.39,-6.145)
  Keep-Out Layer board cut-out: -1.765,-4.49 1.765,-4.49 1.765,0 -1.765,0
TESTPIN [mil]
  round 70 hole 40: 1(0,0)
  silkscreen extent -40,-40 40,40, body extent -40,-40 40,40, height 470
TI-D8_N [mm] "SOIC, 8-Leads, Body 4.9x3.9mm, Pitch 1.27mm, IPC Medium Density"
  oval 2.2x0.6 smd: 1(-2.4,1.905) 2(-2.4,0.635) 3(-2.4,-0.635) 4(-2.4,-1.905) 5(2.4,-1.905) 6(2.4,-0.635) 7(2.4,0.635) 8(2.4,1.905)
  silkscreen extent -2.52,-2.5 0.9,2.88, body extent -2,-2.5 2,2.5, height 1.75
TI-DRC10-2400X1650TP_V [mm] "SON, 10-Leads, Body 3x3mm, Pitch 0.5mm, Thermal Pad 3x1.65mm"
  rect 0.85x0.28 smd: 1(-1.475,1) 2(-1.475,0.5) 3(-1.475,0) 4(-1.475,-0.5) 5(-1.475,-1) 6(1.475,-1) 7(1.475,-0.5) 8(1.475,0) 9(1.475,0.5) 10(1.475,1)
  rect 1.65x2.4 smd: 11(0,0)
  Component Side region: -0.11,-1.2 -0.11,-1.7 -0.39,-1.7 -0.39,-1.2
  Component Side region: 0.11,-1.2 0.11,-1.7 0.39,-1.7 0.39,-1.2
  Component Side region: -0.11,1.2 -0.11,1.7 -0.39,1.7 -0.39,1.2
  Component Side region: 0.11,1.2 0.11,1.7 0.39,1.7 0.39,1.2
  silkscreen extent -2,-1.55 1.55,1.6, body extent -1.5,-1.5 1.5,1.5, height 1
"TSOP-5 _ NCP361SNT1G" [mm] "SOT23, 5-Leads, Body 3.00x2.75mm, Pitch 0.95mm, IPC Medium Density"
  rect 1x0.7 smd: 1(-1.2,0.95) 2(-1.2,0) 3(-1.2,-0.95) 4(1.2,-0.95) 5(1.2,0.95)
  silkscreen extent -1.33,-1.5 0.35,1.97, body extent -0.75,-1.5 0.75,1.5, height 1.1
"WQFN48 for DS90UB914A" [mm] "QFN, 48-Leads, Body 7.00x7.00mm, Pitch 0.50mm, Thermal Pad 5.10x5.10mm, IPC Medium Density"
  rect 0.6x0.25 smd mask+0: 1(-3.4,2.75) 2(-3.4,2.25) 3(-3.4,1.75) 4(-3.4,1.25) 5(-3.4,0.75) 6(-3.4,0.25) 7(-3.4,-0.25) 8(-3.4,-0.75) 9(-3.4,-1.25) 10(-3.4,-1.75) 11(-3.4,-2.25) 12(-3.4,-2.75) 25(3.4,-2.75) 26(3.4,-2.25) 27(3.4,-1.75) 28(3.4,-1.25) 29(3.4,-0.75) 30(3.4,-0.25) 31(3.4,0.25) 32(3.4,0.75) 33(3.4,1.25) 34(3.4,1.75) 35(3.4,2.25) 36(3.4,2.75)
  rect 0.25x0.6 smd mask+0: 13(-2.75,-3.4) 14(-2.25,-3.4) 15(-1.75,-3.4) 16(-1.25,-3.4) 17(-0.75,-3.4) 18(-0.25,-3.4) 19(0.25,-3.4) 20(0.75,-3.4) 21(1.25,-3.4) 22(1.75,-3.4) 23(2.25,-3.4) 24(2.75,-3.4) 37(2.75,3.4) 38(2.25,3.4) 39(1.75,3.4) 40(1.25,3.4) 41(0.75,3.4) 42(0.25,3.4) 43(-0.25,3.4) 44(-0.75,3.4) 45(-1.25,3.4) 46(-1.75,3.4) 47(-2.25,3.4) 48(-2.75,3.4)
  rect 5.1x5.1 smd paste-6: 49(0,0)
  silkscreen extent -4.47,-3.7 3.7,3.7, body extent -3.55,-3.55 3.55,3.55, height 0.8

## Part data
C6 C7 C8 C9 C10 C11 C12 C13 C14 C15 C16 C17 C18 C19 C20 C21 C22 C23 C24 C25 C26 C27 C28 C29 C30 C74 C75 C76 C77: library part Capacitor
C33 C34: "Solid Tantalum Chip Capacitor, Standard T491 Series - Industrial Grade"
C35 C36: "Solid Tantalum Chip Capacitor, Standard T495 Series - Low ESR, Surge Robust"
K1 K2 K3: "JMPR2 OPEN BY DEFAULT"
R1 R6 R34 R35 R36 R37 R38 R39 R40 R41 R42 R43 R44 R45 R46 R56 R57: library part Resistor
SW4: "Push Button Switch"
TP1 TP2 TP3 TP4: "TESTPIN SINGLE PIN HEADER"
U5: "1 Mbit, 400kHz, 1.7V, I2C Serial EEPROM, 8-Pin PDIP, Industrial Temperature"
U6: "Single Output LDO, 1.5 A, Adjustable 0.8 to 3.6 V Output, 0.8 to 5.5 V Input, with Programmable Soft Start, 10-pin SON (DRC), -40 to 125 degC, Green (RoHS & no Sb/Br)"
U7: "Single Output Fast Transient Response LDO, 1 A, Adjustable 1.2 to 5.5 V Output, 2.7 to 10 V Input, with Low IQ, 8-pin SOIC (D), -40 to 125 degC, Green (RoHS & no Sb/Br)"
U8: "Buck Step Down Regulator with 2.05 to 6 V Input and 1.8 V Output, -40 to 85 degC, 6-Pin SON (DRY), Green (RoHS & no Sb/Br)"

## Free pads (board coordinates)
  round 125 hole 125 unplated: HOLE(985,1450)

## Via types
v1: diameter 31, hole 14, Component Side to Solder Side, tented both sides, 162 vias
v2: diameter 14, hole 7, Component Side to Solder Side, tented both sides, 109 vias
v3: diameter 19.68, hole 7.87, Component Side to Solder Side, tented both sides, 13 vias

## Nets (pads, with @x,y where several pads share a name; then routed paths per layer and width w, separated by ;. In a path a pad name is that pad's centre, name@x,y a point inside that pad or via, vN(x,y) a via of type N, cw(c..) or ccw(c..) an arc to the next point about the centre after c; other vN are vias at no path point)
AVDD: C52.1 C53.1 L7.2 U2.A7 | length 1043.6
  Component Side w5: C52.1@1585,537.5 1602.26,554.76 1602.26,660 1622.76,680.5 v2(1622.76,681.77) U2.A7@1638.5,697.52
  Component Side w20: v1(2085,135) L7.2@2140.16,135 2140.16,77.34 C53.1@2147.5,70
  Solder Side w20: v2(1622.76,681.77) 1622.76,597.24 v1(2085,135)
BISTEN: R40.0 SW2.1 U4.6 | length 383.9
  Component Side w8: SW2.1@1372.5,1662.5 1395.16,1639.84 U4.6@1641.14,1639.84
  Component Side w10: R40.0@1310,1582.5 1310,1600 SW2.1@1372.5,1662.5
CLKIN: *1.3 U2.D7 | length 686.5
  Component Side w6: v2@1089.29,824.29 v2(1090,825) ; v2(1590,810) 1594.27,805.73 1612.69,805.73 1626.42,792.01 U2.D7@1638.5,792.01
  Component Side w10: *1.3@1045,824.29 v2@1089.29,824.29
  Solder Side w6: v2(1090,825) 1126.72,825 ccw(c1126.72,893.28) 1175,845 1245.86,915.86 cw(c1280,881.72) 1280,930 1343.79,930 cw(c1343.79,878.79) 1379.99,915.01 1435.79,859.21 ccw(c1448.37,871.8) 1448.37,854 1486.41,854 1516.65,823.76 1566.39,823.76 1580.15,810 v2(1590,810)
CLKIN_32: R59.1 U2.D6 | length 549.9
  Component Side w5: R59.1@1245,627.5 1238.75,633.75 1250,645 v2(1250,685) ; v2(1655.75,776.26) v2@1657.01,775 ; v2@1655.75,777.76 U2.D6@1670,792.01
  Solder Side w5: v2(1250,685) 1250,698.18 cw(c1312.33,698.18) 1312.33,760.51 1639.76,760.51 ; 1640,760.51 ccw(c1640,776.26) v2(1655.75,776.26)
CVDDQ: *1.1 *1.4 C50.1 C51.1 C79.1 C82.1 L8.1 R26.1 R27.1 R28.1 R58.1 U2.B6 u10.1 u10.12 | length 5776.2
  Component Side w5: U2.B6@1670,729.02 1687.02,712 v2@1717,712
  Component Side w10: v1(915,675) C82.1@962.5,675 945,692.5 *1.1@945,735.71 *1.4@945,824.29 ; v1(1130,325) 1152.5,325 C79.1@1167.5,340 1145.79,361.71 u10.12@1145.79,502.24
  Component Side w12: R58.1@327.5,475 327.5,402.5 v1(410,320) 665,320 850,505 v1(850,595) ; v1(1835,175) 1835,225 1895,285
  Component Side w20: 1880,510 C50.1@1917.5,510 ; C51.1@1917.5,555 1870,555 v1(1870,550) 1870,315 1965,220 2130,220 2140,210 2140,225 2170,255 2235,255 2393.5,413.5 2488.5,413.5 2570,495 2570,680 2405,845 2350,845 ; R28.1@2267.5,680 2315,680 2350,715 2350,750 2310,790 ; R27.1@2267.5,790 2310,790 ; R26.1@2267.5,900 2315,900 2350,865 2350,845 ; 2310,790 2315,790 2350,825 2350,845
  Solder Side w5: v2@1717,712 1717,693 1860,550 v1(1870,550)
  Solder Side w10: v1(1130,325) 1135,325 1200,260 1265,260 1310,215 1310,97.5
  Solder Side w12: v1(410,320) 410,235 547.5,97.5 1310,97.5 1755,95 v1(1835,175) ; v1(850,595) 850,610 v1(915,675)
  other v2: 1717,713
DQ2: R29.1 U4.22 | length 178.2
  Component Side w8: U4.22@1843.9,1496.14 1844,1496.04 1844,1481 1855,1470 R29.1@1855,1322.5
DQ3: R25.1 U4.21 | length 190.5
  Component Side w8: R25.1@1805,1322.5 1835,1352.5 1835,1456.64 1824.21,1467.43 U4.21@1824.21,1496.14
DQ4: R24.1 U4.19 | length 186
  Component Side w8: R24.1@1755,1322.5 1755,1390 1779.16,1414.16 1779.16,1460.8 1784.84,1466.48 U4.19@1784.84,1496.14
DQ5: R23.1 U4.18 | length 198.6
  Component Side w8: R23.1@1705,1322.5 1705,1365 1765.16,1425.16 U4.18@1765.16,1496.14
DQ6: R22.1 U4.16 | length 203
  Component Side w8: R22.1@1655,1322.5 1655,1340 1725.79,1410.79 U4.16@1725.79,1496.14
DQ7: R21.1 U4.15 | length 215.5
  Component Side w8: R21.1@1605,1322.5 1605,1335 1706.1,1436.1 U4.15@1706.1,1496.14
DQ8: R20.1 U4.14 | length 228.1
  Component Side w8: R20.1@1555,1322.5 1555,1347.68 1686.42,1479.09 U4.14@1686.42,1496.14
DQ9: R19.1 U4.13 | length 240.6
  Component Side w8: R19.1@1505,1322.5 1505,1334.41 U4.13@1666.73,1496.14
EZ_SSTX_N: C2.1 U2.A6 | length 167.3
  Component Side w11: C2.1@1660,537.5 1668.29,545.79 ccw(c1649.08,565) 1676.25,565 1676.25,681.05 cw(c1691.33,696.13) 1670,696.13 U2.A6@1670,697.52
EZ_SSTX_P: C3.1 U2.A5 | length 169.1
  Component Side w11: U2.A5@1701.5,697.52 1701.5,696.13 cw(c1680.16,696.13) 1695.25,681.05 1695.25,565 ccw(c1713.95,565) 1700.73,551.77 C3.1@1715,537.5
GND: *1.2 C1.0 C4.0 C5.0 C6.1 C7.1 C8.1 C9.1 C10.1 C11.1 C12.1 C13.1 C14.1 C15.1 C16.1 C17.1 C18.1 C19.1 C20.1 C23.1 C24.1 C25.1 C28.1 C29.1 C30.1 C31.1 C32.1 C33.2 C34.2 C35.2 C36.2 C37.0 C38.0 C39.0 C40.0 C41.0 C42.0 C43.0 C44.0 C45.0 C46.0 C47.0 C48.0 C49.0 C50.0 C51.0 C52.0 C53.0 C54.0 C55.0 C56.0 C57.0 C58.0 C59.0 C60.0 C61.0 C62.0 C63.0 C64.0 C65.0 C66.0 C67.- C68.- C69.0 C70.0 C71.- C72.- C73.0 C74.1 C75.1 C76.1 C77.1 C78.0 C79.0 C80.0 C81.0 C82.0 J1.5 J1.8 J2.2 J3.2 J4.2 J5.2 J6.1 L2.1 R4.0 R5.0 R30.0 R31.0 R32.0 R34.1 R35.1 R44.0 R45.0 R46.0 R54.0 R55.0 R64.0 R65.0 R66.0 SW1.6 SW1.7 SW1.8 SW2.5 SW2.6 SW2.7 SW2.8 SW3.1 SW3.2 SW3.3 SW4.1 TP1.1 U1.GND U2.A1 U2.A8 U2.B7 U2.B8 U2.B9 U2.D8 U2.E2 U2.G1 U2.G11 U2.J8 U2.J9 U2.J10 U2.K3 U2.K4 U2.K9 U2.K10 U2.K11 U2.L1 U2.L2 U2.L3 U2.L6 U2.L10 U2.L11 U3.2 U3.3 U4.43 U4.44 U4.49 U5.4 U5.7 U6.6 U6.11 U7.1 U7.2 U8.4 u9.NC u10.6 | length 10160.5
  Component Side w5: v2(1480,870) 1496.02,870 U2.G11@1512.52,886.5 ; v2(1490,1035) U2.L11@1512.52,1012.48 ; v2(1493.5,1000) U2.K11@1512.52,980.98 ; v2@1540.98,1084.02 v2(1543.77,1084.02) 1544.02,1084.02 U2.L10@1544.02,1012.48 U2.K10@1544.02,980.98 U2.J10@1544.02,949.49 ; v2(1561.5,711.5) 1561.5,715 U2.B9@1575.51,729.02 ; U2.J9@1575.51,949.49 v2(1591.02,965) 1606.54,949.49 U2.J8@1607.01,949.49 ; U2.K9@1575.51,980.98 v2(1590,995.47) ; v2(1590,776.01) 1591.01,776.01 U2.D8@1607.01,792.01 ; U2.A8@1607.01,697.52 1611.5,697.52 1625,711.02 U2.B8@1607.01,729.02 ; v2@1625,715 1628.98,715 1638.5,724.53 U2.B7@1638.5,729.02 ; U2.L6@1670,1012.48 1687.43,995.05 v2@1690.5,995.05 ; U2.K4@1732.99,980.98 U2.K3@1764.49,980.98 U2.L3@1764.49,1012.48 U2.L2@1795.98,1012.48 U2.L1@1827.48,1012.48 v2(1810,995) ; U2.E2@1795.98,823.5 v2@1809.49,810 ; v2@1810,870 1810.98,870 U2.G1@1827.48,886.5 ; U2.A1@1827.48,697.52 1845,680 v2(1845,676.02)
  Component Side w8: U4.44@1745.47,1763.86 1745.47,1659.53 U4.49@1765.16,1639.84 ; U4.43@1765.16,1763.86 U4.49@1765.16,1639.84 ; v2(1775,1385) 1797.5,1385 C29.1@1805,1377.5 ; v3(1775,1630) U4.49@1765.16,1639.84 ; v2(2205,1825) R35.1@2232.28,1825
  Component Side w10: C82.0@1017.5,675 1045,702.5 *1.2@1045,735.71 ; C79.0@1222.5,340 1244.21,361.71 u10.6@1244.21,407.76
  Component Side w12: C73.0@462.81,1135.31 462.81,1155.73 480.47,1173.39 ; SW3.1@510,75 SW3.2@560,75 ; U6.11@510.31,1200.94 U6.6@548.38,1200.94 ; C31.1@517.5,990 C32.1@517.5,945 545,917.5 U5.7@545,845 ; v1(560,165) SW3.2@560,75 ; SW3.3@610,75 SW3.2@560,75 ; v1(620.31,1185.31) R55.0@667.81,1185.31 ; v1(757.5,1617.5) R54.0@757.5,1660 ; C28.1@1430,1667.5 C24.1@1475,1667.5 C23.1@1520,1667.5 1527.5,1660 v2(1550,1660) ; C20.1@1432.5,1795 C19.1@1432.5,1840 1432.5,1877.5 v1(1440,1885) ; J4.2@1435,1975 1445,1965 C8.1@1552.5,1965 C9.1@1552.5,2010 C10.1@1552.5,2060 ; C6.1@1522.5,1480 C7.1@1522.5,1530 ; J6.1@1680.28,2008.07 1675,2002.8 v1(1675,1905) R34.1@1707.28,1905 ; J1.8@1723.5,157.75 v2(1723.5,248.5) 1725,250 U1.GND@1725,335 v2(1725,405) ; v2(1872.5,1797.5) C14.1@1872.5,1875 ; C11.1@1937.5,1930 C12.1@1937.5,1975 C13.1@1937.5,2020 1950,2020 1965,2035 1965,2095 v1@1975,2105 ; C54.0@1972.5,630 1972.5,625.5 1983,615 2040,615 2070,585 v1(2090,585) ; C25.1@2062.5,1555 2125,1492.5 v1(2125,1485) ; C17.1@2062.5,1780 2062.5,1645 v1(2105,1645) ; R45.0@2062.5,1825 v1(2105,1825) ; R44.0@2062.5,1930 v1(2105,1930) ; R46.0@2062.5,2065 v1(2105,2065) ; v1(2670,1215) R65.0@2670,1252.5 ; v1(2670,1430) R66.0@2670,1462.5 ; v1(2675,990) R64.0@2675,1037.5 ; v1(2945,765) SW1.6@3040,765 SW1.7@3040,815 SW1.8@3040,865
  Component Side w20: C82.0@1017.5,675 1040,652.5 1042.5,652.5 ; SW2.8@1075,1665 1075,1840 1210,1975 J4.2@1235,1975
  Component Side w25: 125,1230 125,1129.88 C33.2@144.88,1110 144.88,1250.12 ; C78.0@327.5,530 355,557.5 v1(355,575) ; v1(465,1545) C72.-@507,1545 ; C70.0@492.81,1355.31 493.31,1355.81 v1(493.31,1453.31) ; C71.-@723.31,1350.31 723.63,1350 v1(765,1350) ; U3.2@922.24,205 U3.3@922.24,242.4 ; C5.0@922.24,319.74 U3.3@922.24,242.4 ; C4.0@980.1,242.4 U3.3@922.24,242.4 ; v1(995,70) C34.2@1059.88,70 ; C60.0@1017.5,1045 v1(1065,1045) ; C79.0@1222.5,340 1250,340 ; v1(1315,905) 1320,900 1335,900 1345,890 C46.0@1367.5,890 ; v1(1315,955) 1325,955 1345,935 C58.0@1367.5,935 ; v1(1315,995) 1335,995 1350,980 C43.0@1367.5,980 ; v1(1315,1040) 1352.5,1040 C42.0@1367.5,1025 ; v1(1315,1080) 1357.5,1080 C39.0@1367.5,1070 ; v1(1325,700) C38.0@1362.5,700 ; v1(1325,735) 1352.5,735 C37.0@1367.5,750 ; v1@1325,855 1335,845 C69.0@1367.5,845 C49.0@1367.5,810 ; v1(1345,560) 1345,575 1367.5,597.5 C41.0@1367.5,650 ; v1(1530,435) R4.0@1530,482.5 ; v1(1585,435) C52.0@1585,482.5 ; C59.0@1585,1157.5 v1(1585,1190) ; C40.0@1640,1157.5 v1(1640,1190) ; C45.0@1695,1157.5 v1(1695,1200) ; v1(1945,450) 1972.5,477.5 C51.0@1972.5,560 ; C65.0@1972.5,685 C66.0@1972.5,740 2075,740 v1(2085,750) ; C56.0@1972.5,795 2000,795 2020,775 v1(2045,775) ; C47.0@1972.5,850 2000,850 2010,840 v1(2020,840) ; C62.0@1972.5,910 2000,910 v1(2015,925) ; C61.0@1972.5,965 v1(2015,965) ; C48.0@1972.5,1020 1977.5,1025 v1(2015,1025) ; v1(1977.5,297.5) C80.0@1977.5,340 ; C1.0@1982.5,180 1989.84,172.66 L2.1@1989.84,90 ; v1(2073.19,445) u9.NC@2111.69,406.5 ; C64.0@2142.5,850 C63.0@2142.5,895 ; v1(2145,795) C64.0@2145,852.5 ; u9.NC@2198.31,343.5 2260,343.5 2260,330 2225,295 v1(2155,295) 1955,295 1940,310 1940,385 2075,520 v1(2177.5,520) 2280,520 2300,500 v1(2300,475) ; C53.0@2202.5,70 2232.5,40 v1(2345,40) ; C81.0@2257.5,475 v1(2300,475) ; v1@2263.5,343.5 2300,380 v1(2300,475) ; R5.0@2267.5,625 2272.5,620 v1(2315,620) ; R32.0@2267.5,735 v1(2315,735) ; R31.0@2267.5,845 2272.5,850 v1(2315,850) ; R30.0@2267.5,955 2272.5,960 v1(2315,960) ; v1(2465,445) C55.0@2465,482.5 ; C57.0@2465,680 v1(2465,720) ; 1250,340 1195,285 1095,285 1055,325 1055,345 v1(1055,555) 1210.5,710.5 1260.56,710.5 1290,681.06 1290,465 1290,380 1250,340 ; 850,685 v1(850,865) 875,890 v1(1070,890) 1080,890 1120,850 1120,730 1042.5,652.5 1005,615 v1(920,615) 850,685
  other v1: 2600,100 1989.84,140 2600,175 1545,215 1515,250 1565,250 2600,250 920,280 2600,325 2265,340 1290,505 120,625 150,655 95,660 1320,860 110,1240 85,1280 140,1280 335,1755 295,1760 2290,1900 1965,2105 1840,2125 1630,2150 2520,2195 1630,2215 1840,2215
  other v2: 1624,713 1811,809 1813,870 1688,996 1522.5,1505
  other v3: 470.63,1220.63 510,1220.63 470.63,1260 510,1260 1723.82,1578.82 1775,1578.82 1826.18,1578.82 1723.82,1630 1826.18,1630 1723.82,1681.18 1775,1681.18 1826.18,1681.18
IDX0: R41.0 R44.1 U4.35 | length 303.8
  Component Side w8: U4.35@1908.86,1718.58 1920.05,1718.58 1965.5,1764.04 1965.5,1888 R44.1@2007.5,1930 R41.0@2007.5,1975
IDX1: R42.0 R45.1 U4.34 | length 230.8
  Component Side w8: U4.34@1908.86,1698.9 1920.16,1698.9 1984.5,1763.24 1984.5,1763.86 1982.5,1765.86 1982.5,1812.5 2007.5,1837.5 2007.5,1870 R42.0@2000,1862.5
MODE: R43.0 R46.1 U4.37 | length 381.4
  Component Side w8: U4.37@1883.27,1763.86 1883.27,1773.27 1907.5,1797.5 1907.5,1889.14 1918.36,1900 1955,1900 1982.5,1927.5 1982.5,2007.5 1995,2020 R43.0@2007.5,2020 R46.1@2007.5,2065
NetC1_1: C1.1 J1.11 L2.2 | length 726.3
  Component Side w25: J1.11@1302,52.75 J1.11@1414.5,52.75 J1.11@1504.5,52.75 J1.11@1617,52.75 J1.11@1817.5,52.75 ; J1.11@1818,52.25 1882.41,52.25 L2.2@1920.16,90 1927.5,97.34 C1.1@1927.5,180
NetC21_0: C21.0 U4.41 | length 88.4
  Component Side w8: 1804.5,1789.44 1804.5,1810.56 ; U4.41@1804.53,1763.86 1804.53,1789.41 ; 1804.53,1810.59 C21.0@1804.53,1852.28
NetC21_1: C21.1 J6.0 L12.1 R56.0 | length 555.8
  Component Side w10: J6.0@1735,2004.13 1735,1950 1790,1895
  Component Side w15: 1790,1895 1815,1895 1845,1925 1845,2090 1851,2096 1852.01,2096 1869,2112.99 1869,2114 1895,2140 L12.1@2015.16,2140
NetC22_0: C22.0 U4.42 | length 84.9
  Component Side w8: C22.0@1745,1832.28 1784.84,1792.44 U4.42@1784.84,1763.86
NetC22_1: C22.1 R34.0 | length 39.6
  Component Side w10: C22.1@1745,1870 R34.0@1745,1909.57
NetC26_0: C26.0 U4.32 | length 367.1
  Component Side w8: U4.32@1908.86,1659.53 1929.53,1659.53 v2(1940,1670) ; v2(2135,1760) 2227.28,1760 C26.0@2232.28,1755
  Solder Side w8: v2(1940,1670) 2045,1670 v2(2135,1760)
NetC27_0: C27.0 U4.33 | length 432
  Component Side w8: v2(1888.39,1676.82) 1890.79,1679.21 U4.33@1908.86,1679.21 ; v2(2190,1790) C27.0@2232.28,1790
  Solder Side w8: v2(1888.39,1676.82) 1912.21,1653 2053,1653 v2(2190,1790)
NetC27_1: C27.1 R35.0 | length 35
  Component Side w8: C27.1@2267.72,1790 R35.0@2267.72,1825
NetC73_1: C73.1 U6.7 | length 140.5
  Component Side w12: C73.1@517.81,1135.31 530.31,1135.31 577.12,1182.12 577.12,1211.43 567.91,1220.63 U6.7@548.38,1220.63
NetC76_0: C76.0 C77.0 L11.1 L13.2 R57.1